# EAGLE board SparkFun_Thing_Plus_NINA-B306-Panel (EAGLE 9.6.2), part 1 of 6
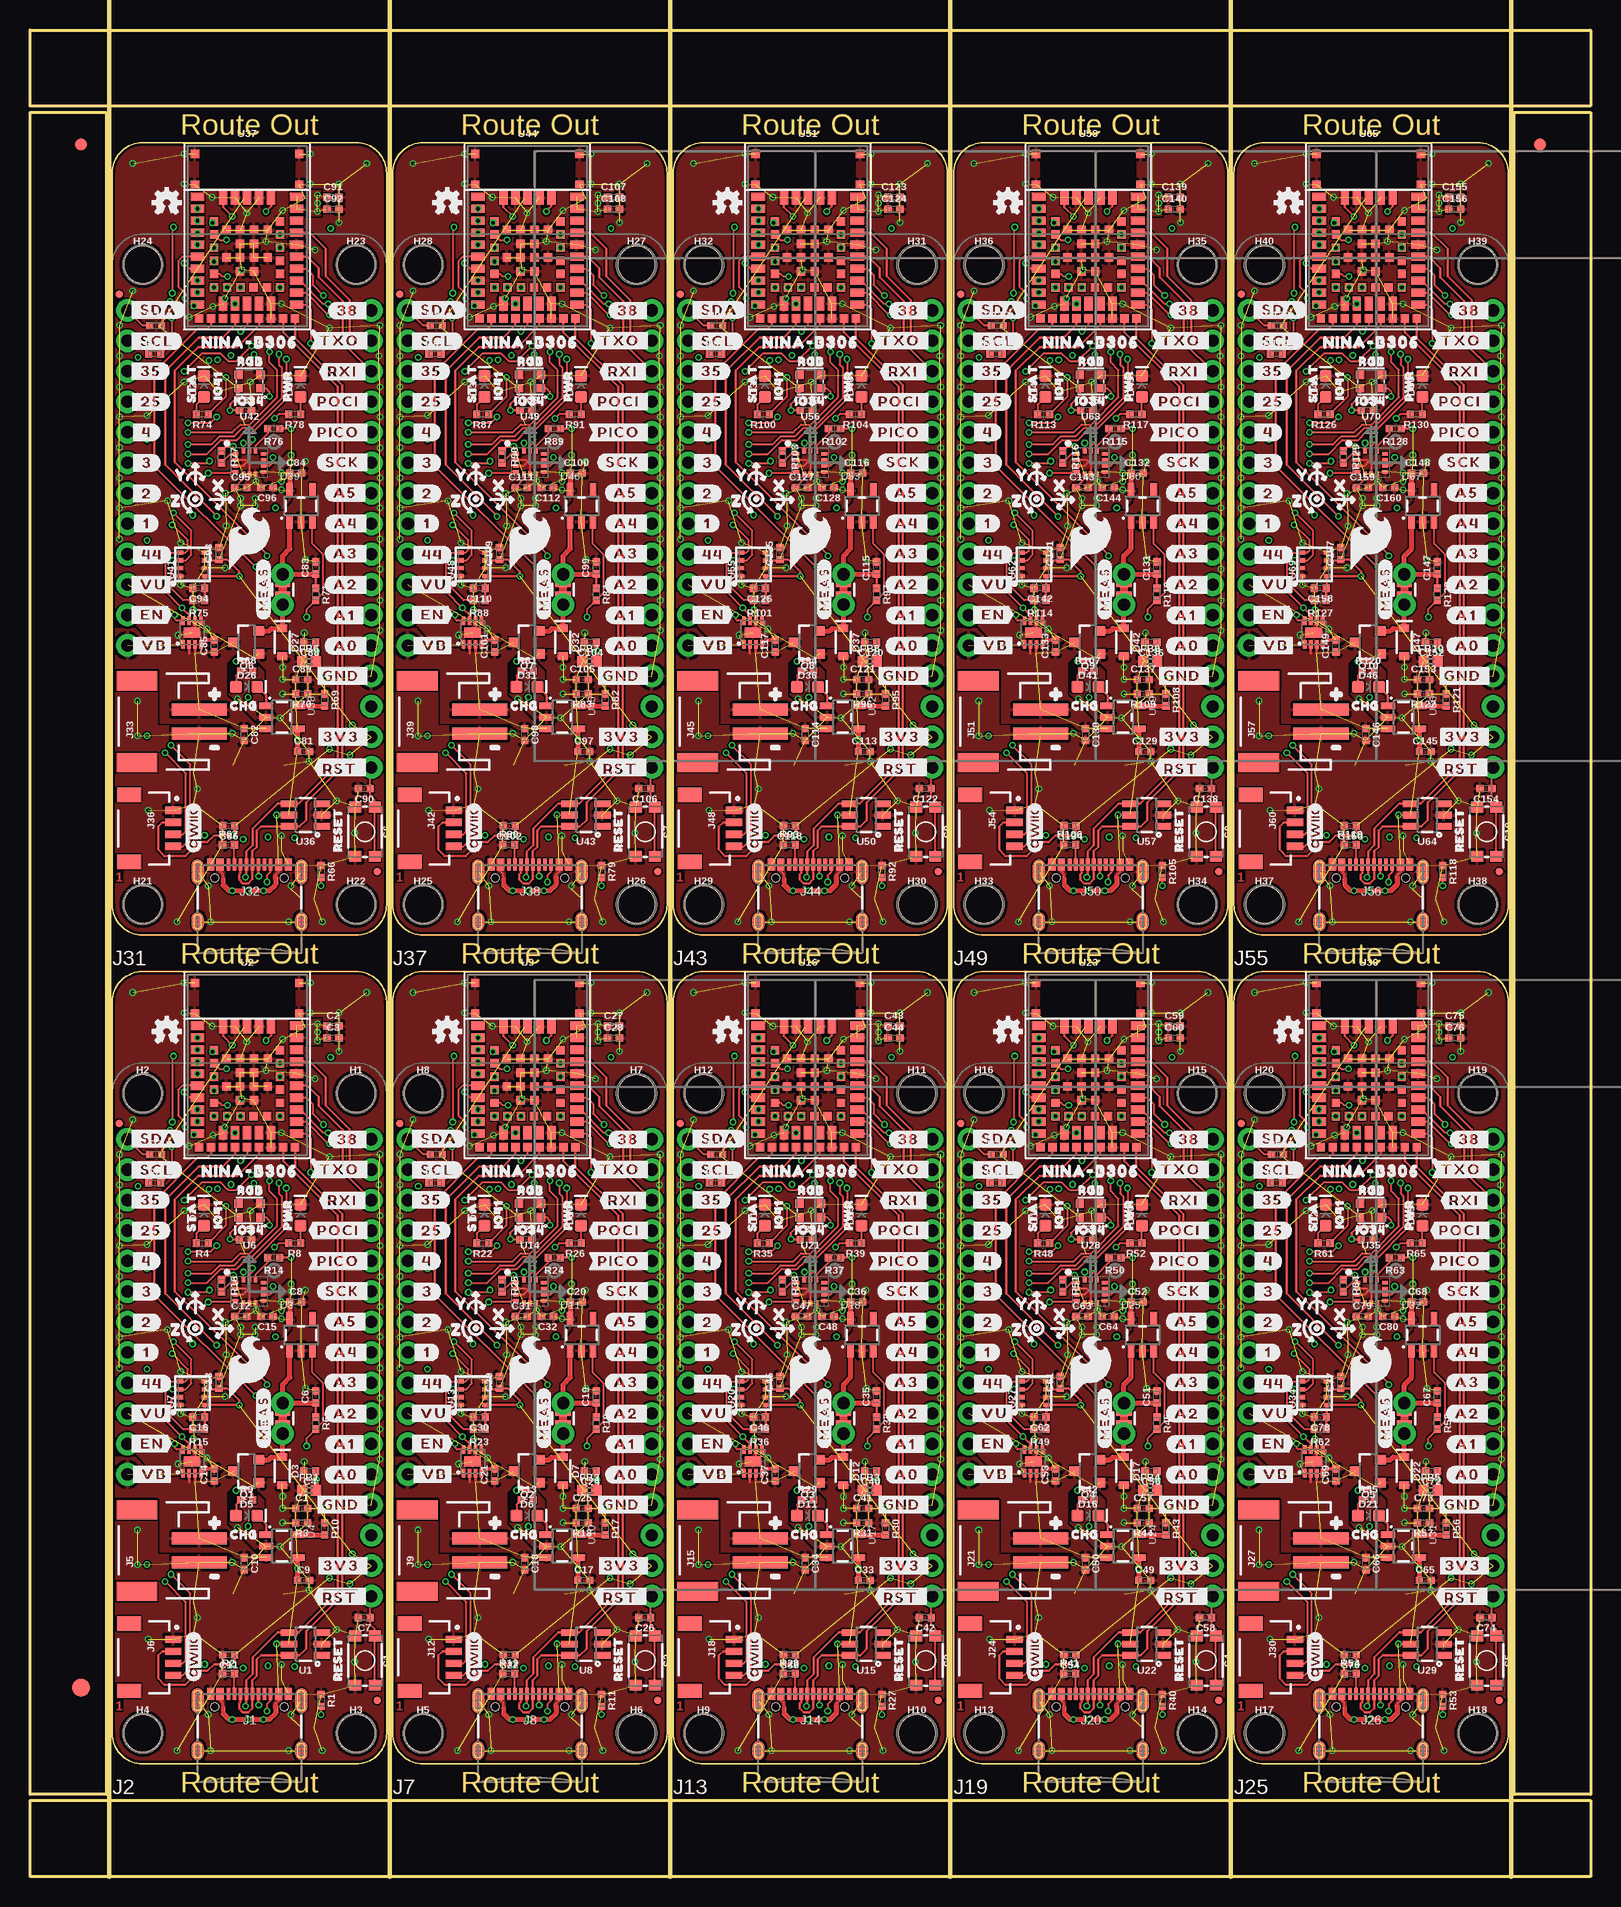
[diagram p0: board, top side]
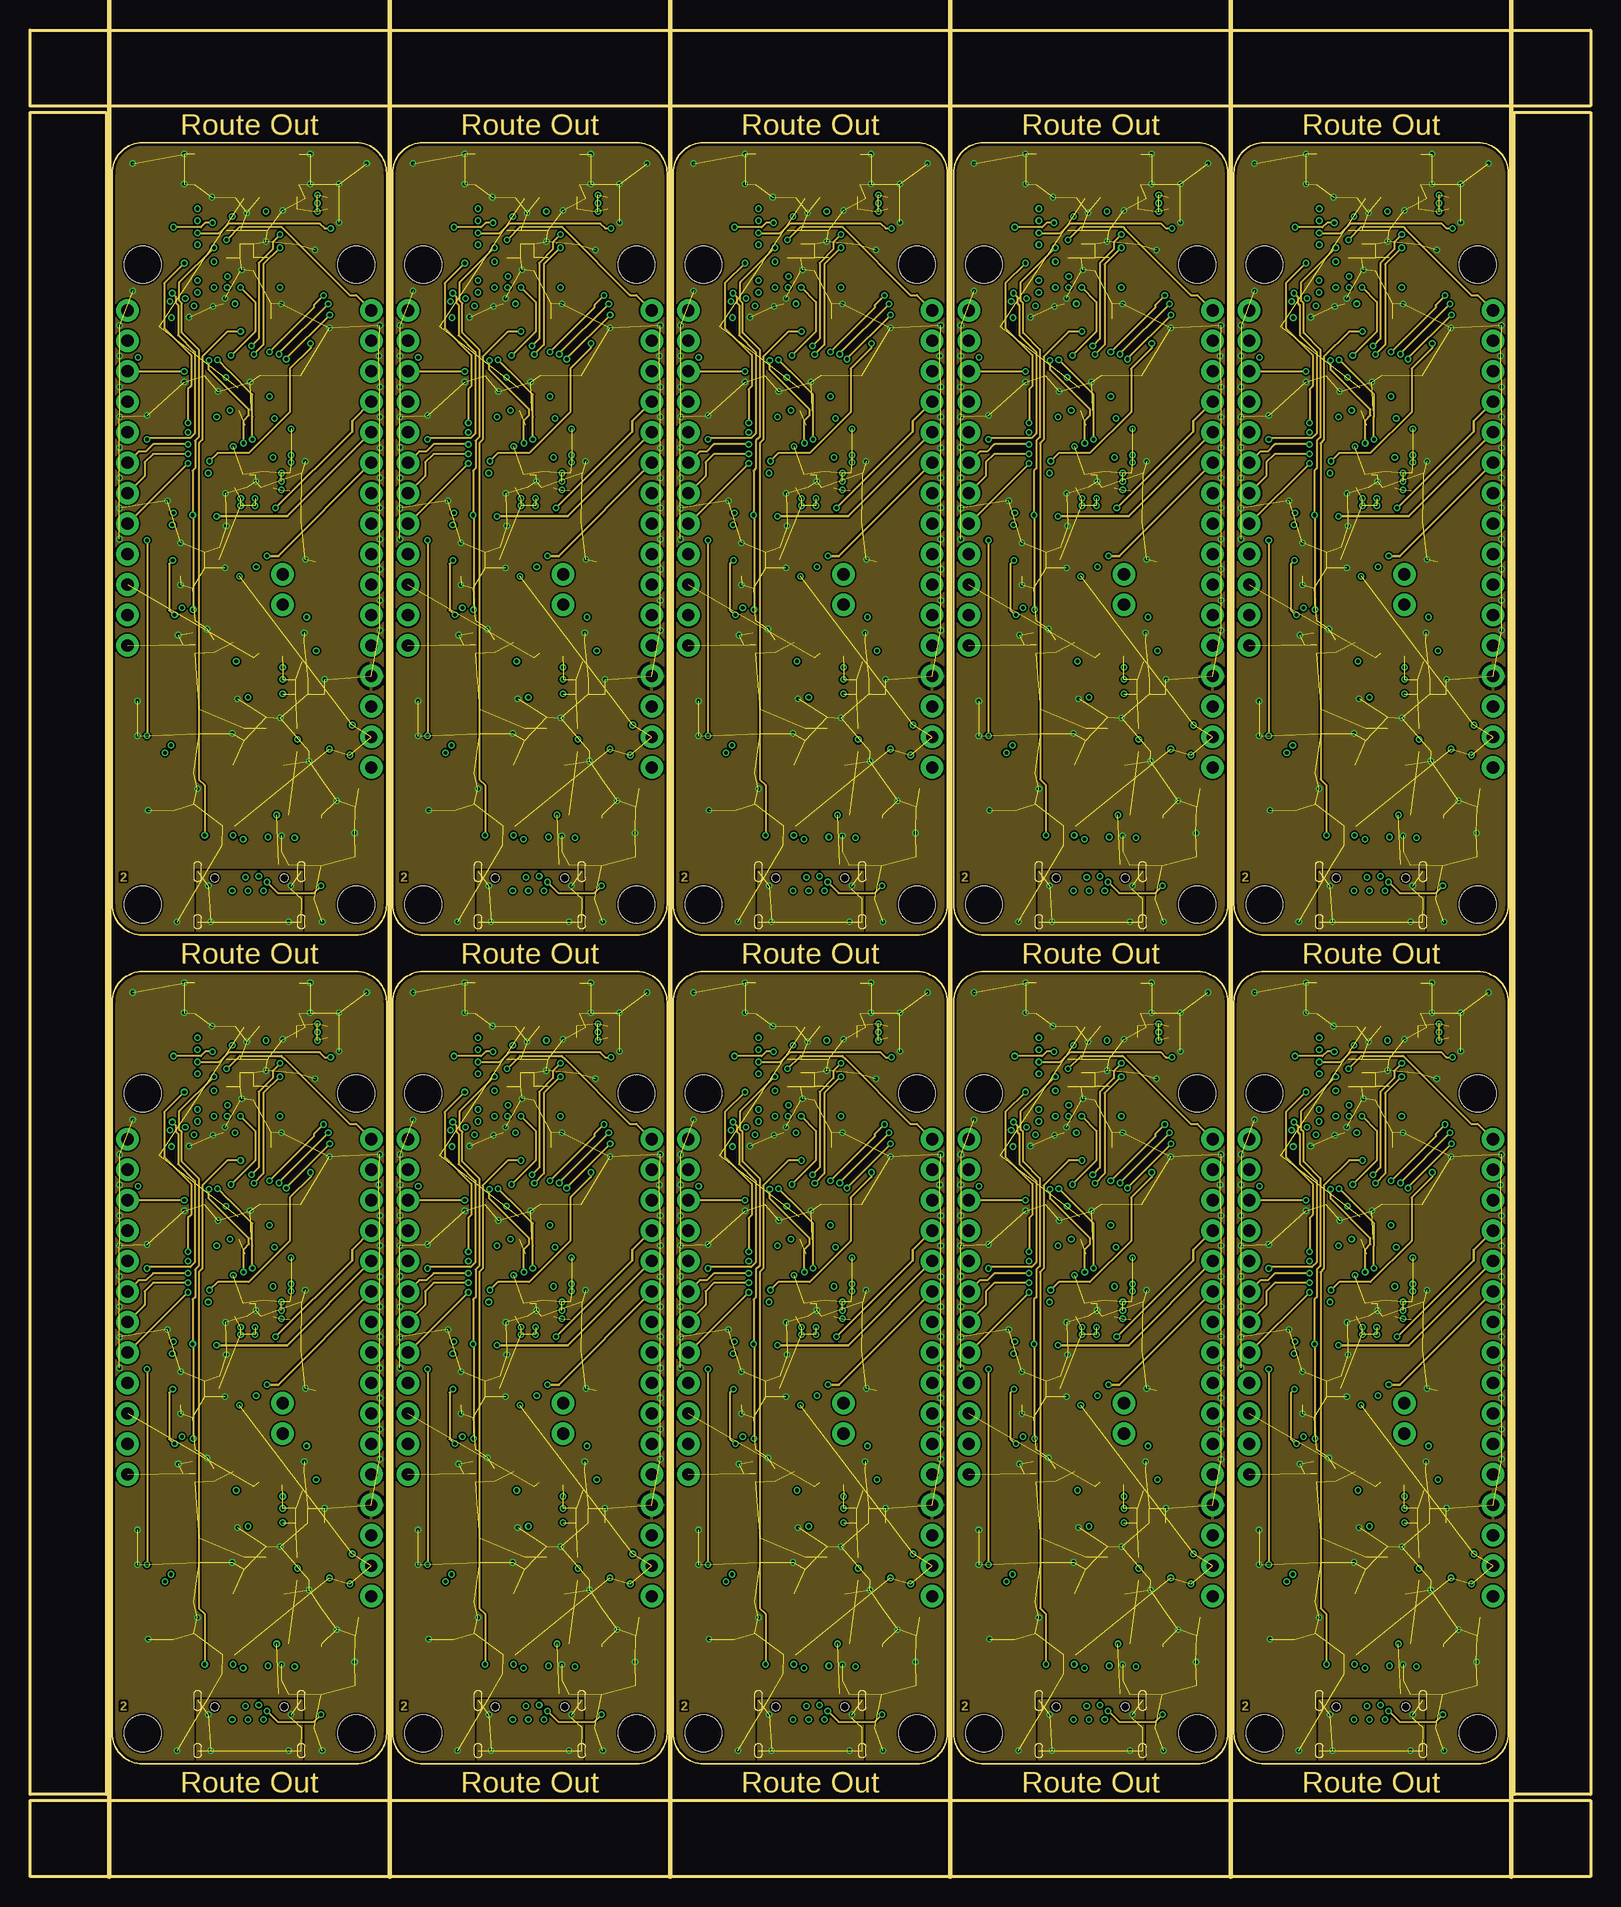
[diagram p1: board, inner layer Route2]
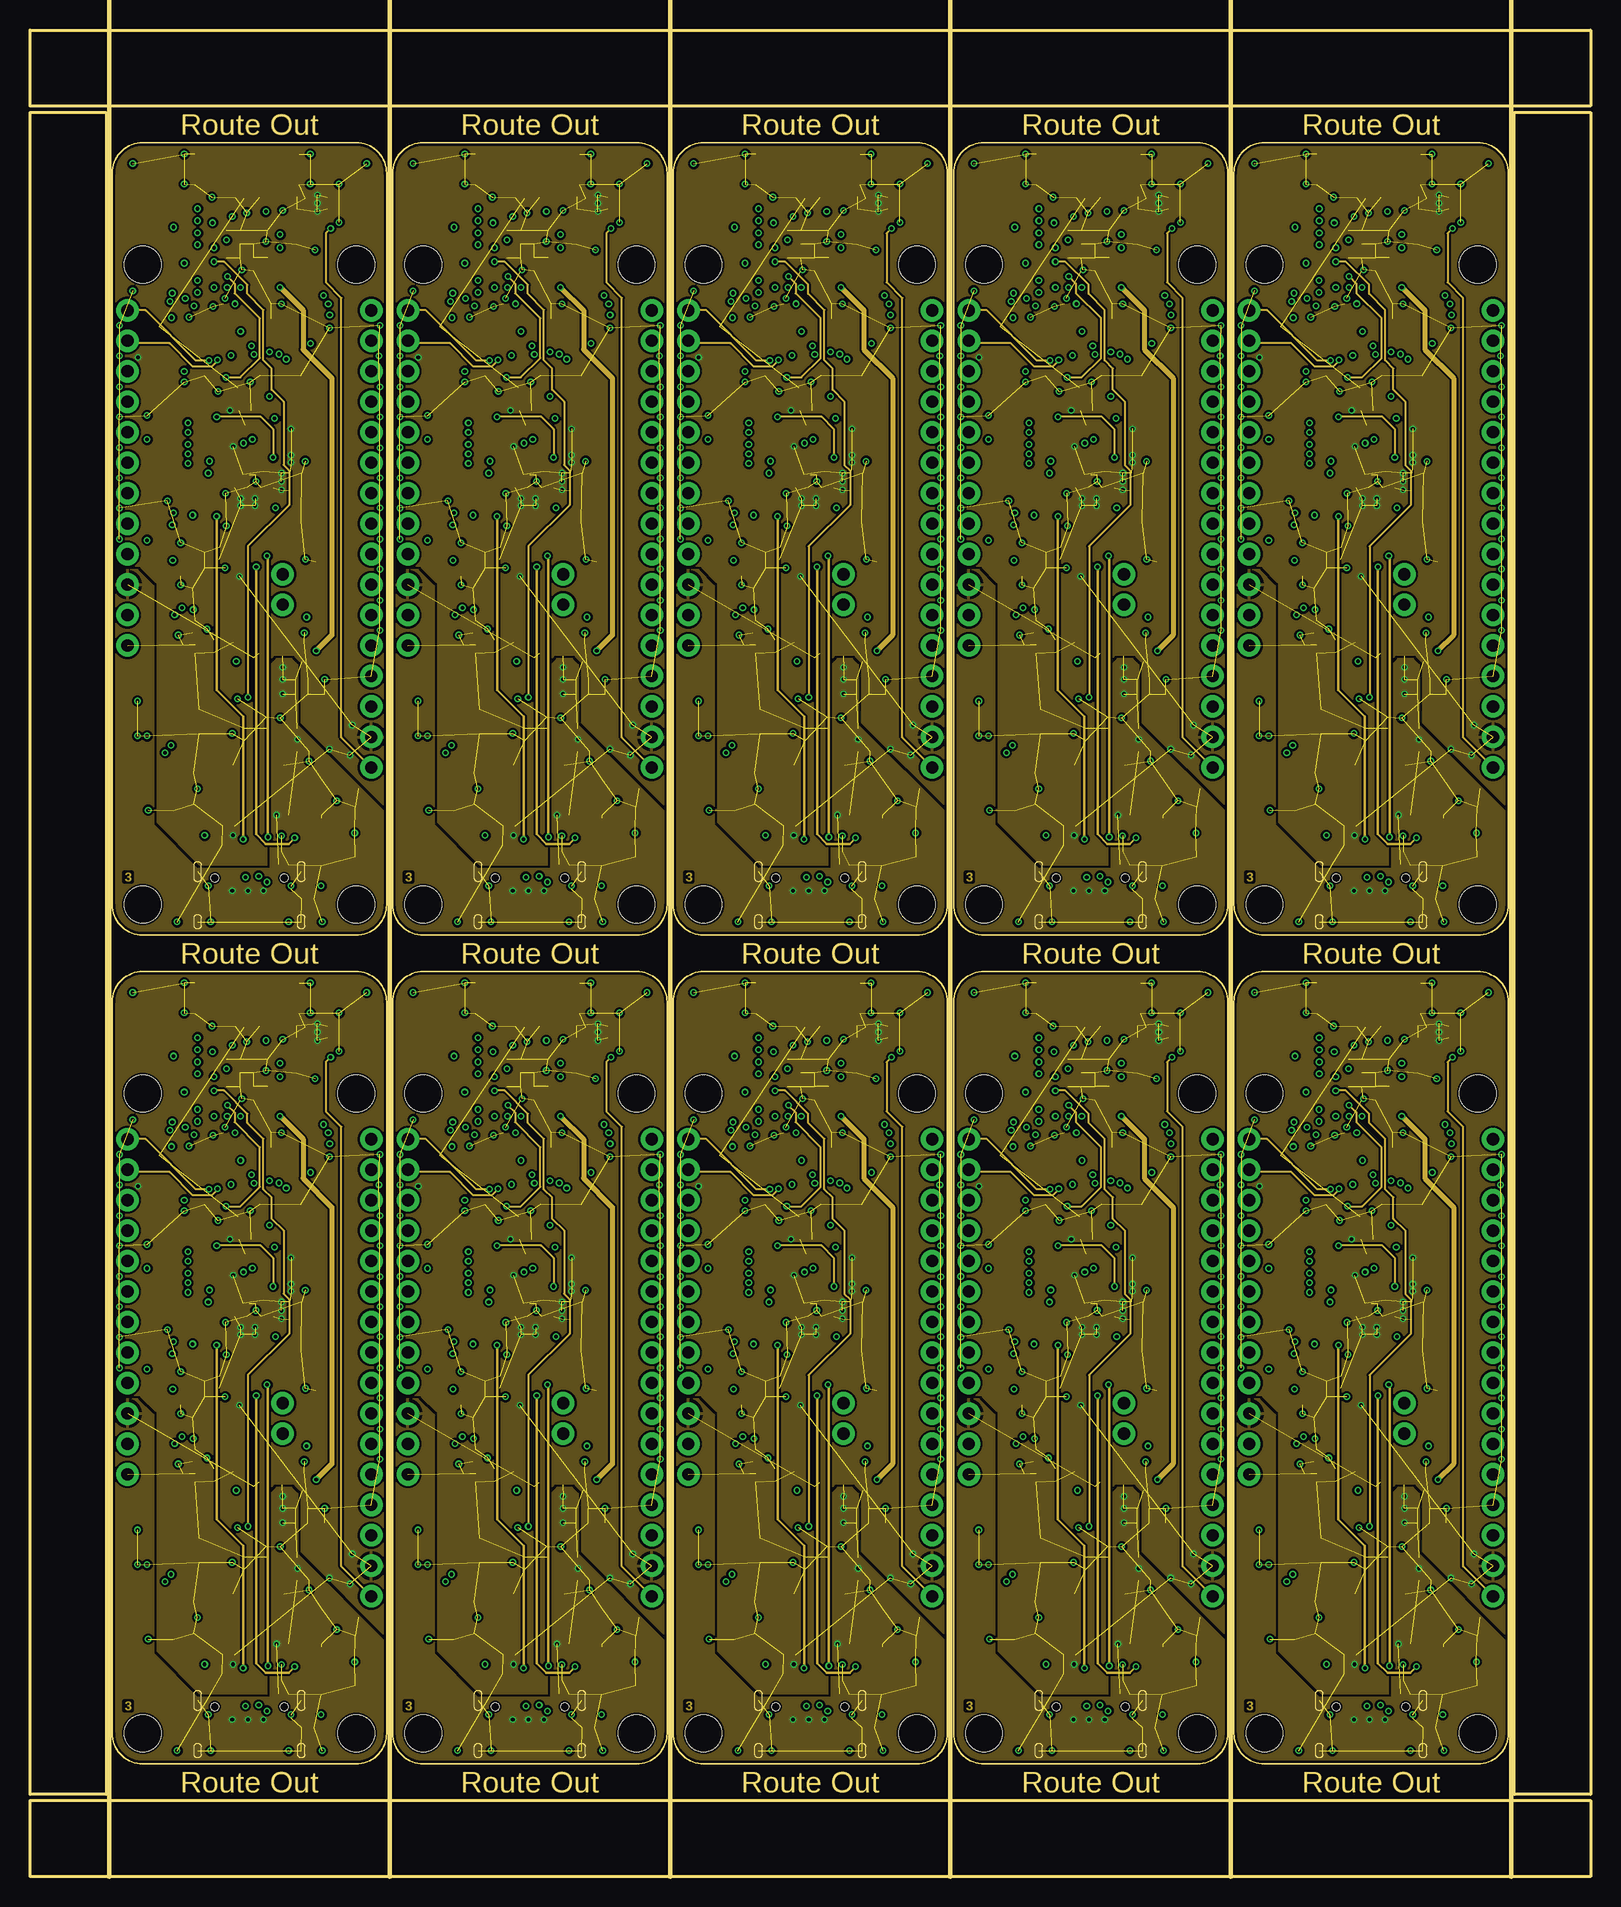
[diagram p2: board, inner layer Route15]
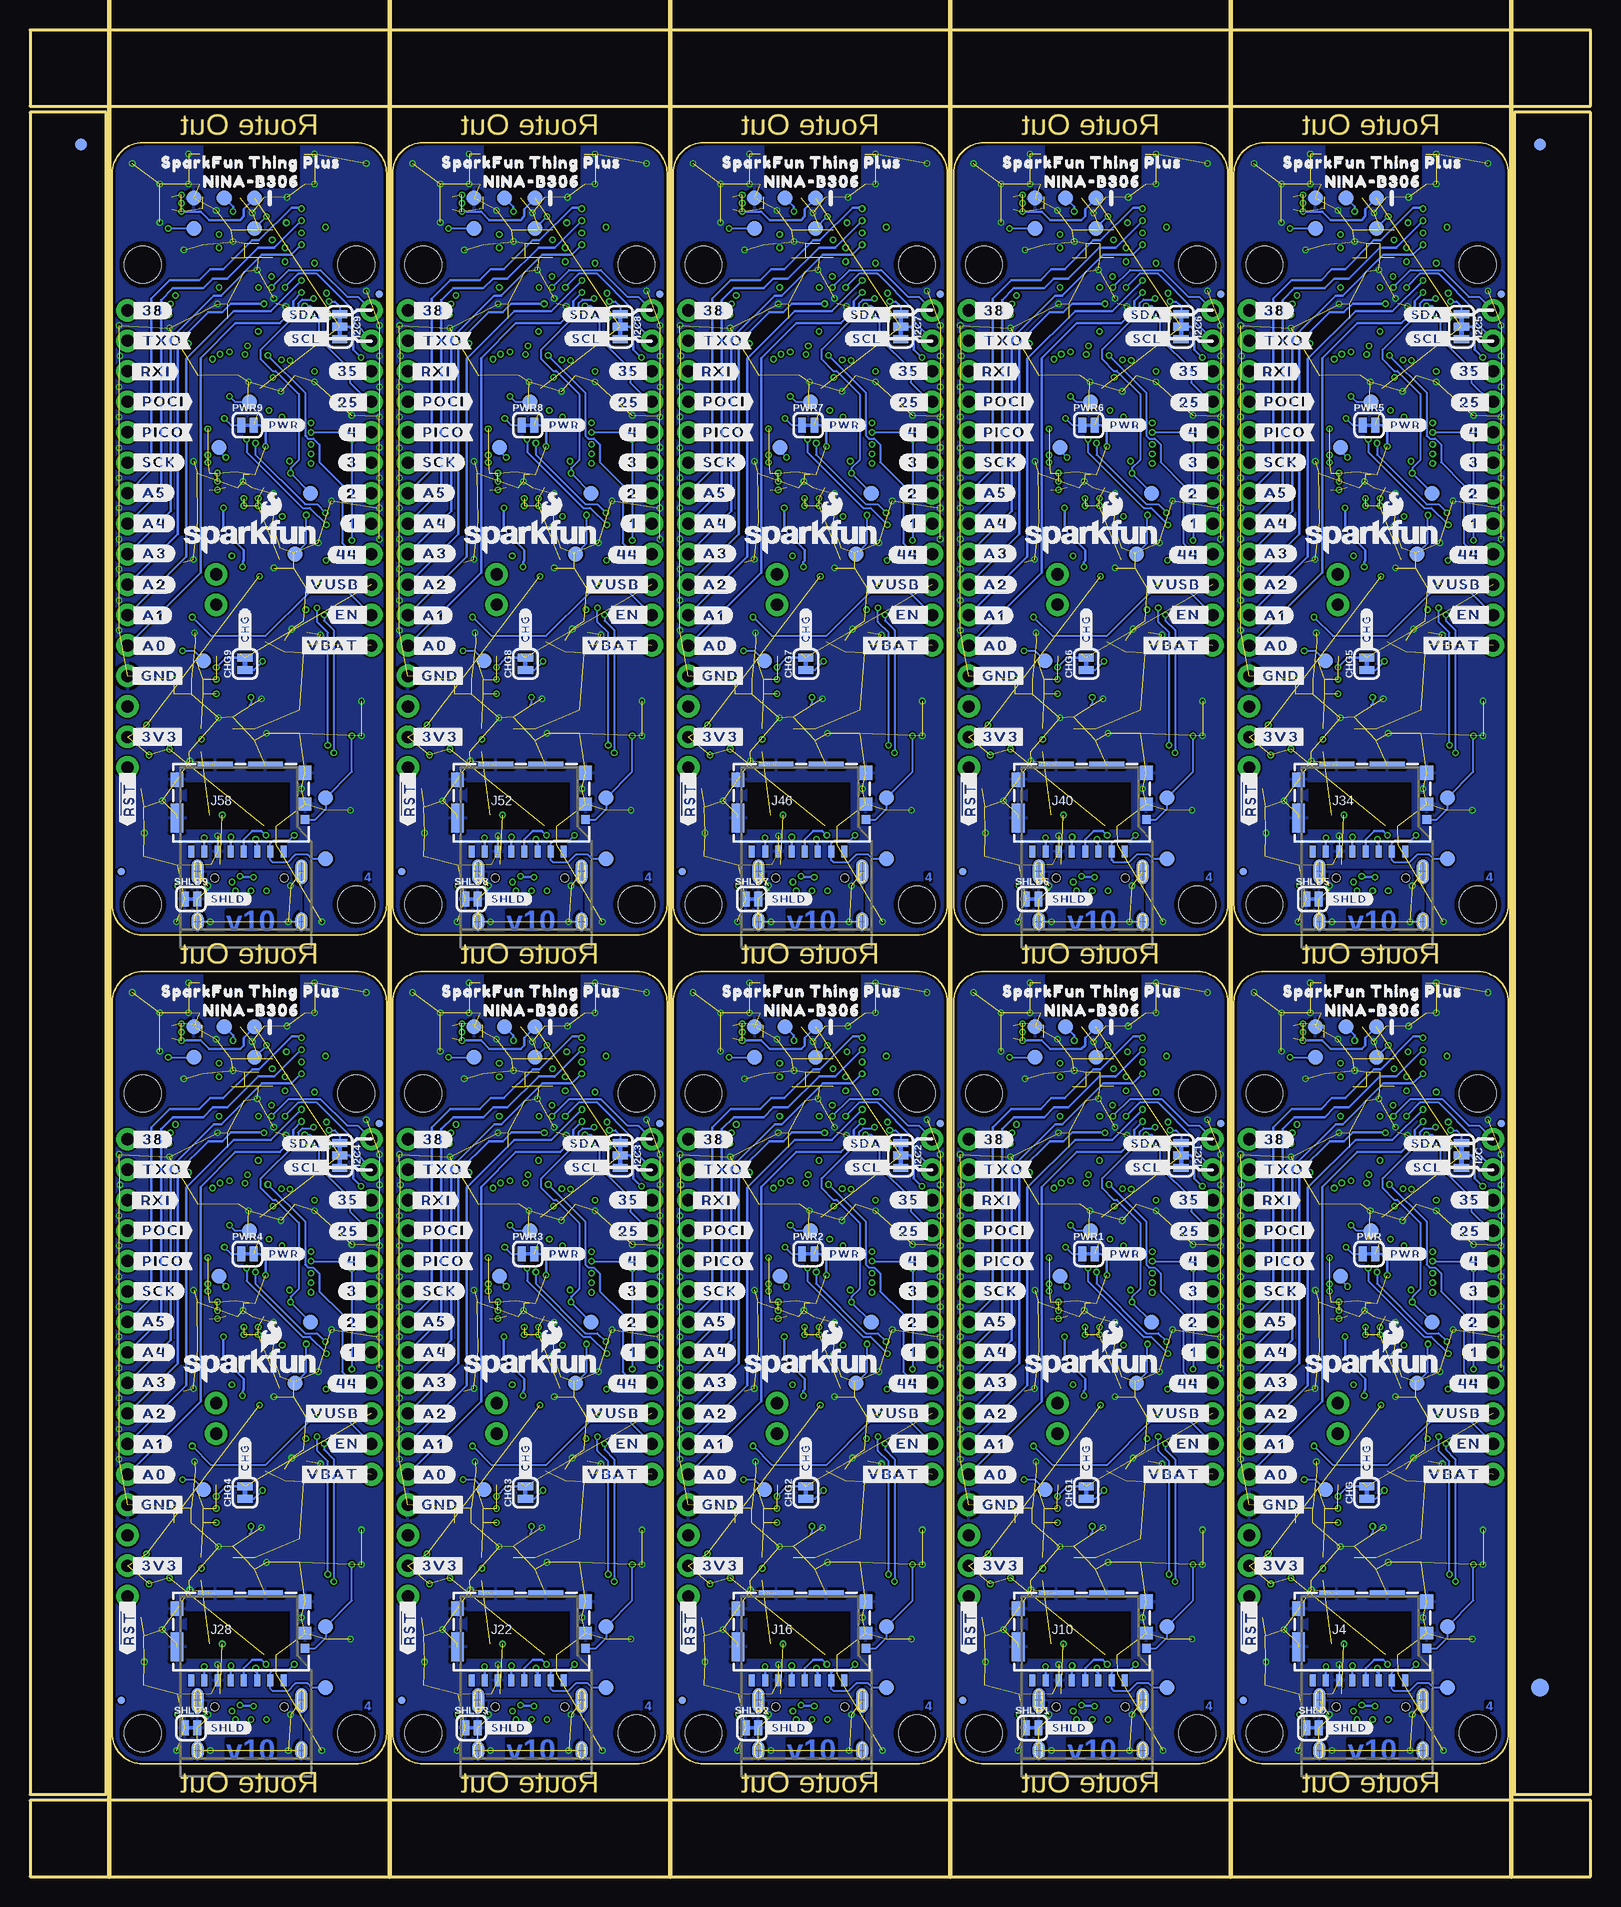
[diagram p3: board, bottom side, seen from below]

Size 130.05 x 153.92 mm. Coordinates in mm from the lower left corner, seen from the top.
Outline: 96 segments
Copper layers (1*2*15*16): Top 0.035mm / dielectric 0.2104mm / Route2 0.0152mm / dielectric 1.065mm / Route15 0.0152mm / dielectric 0.2104mm / Bottom 0.035mm
Design rules "SparkFun_Thing_Plus_NINA-B306": minimum track width 0.1mm, minimum drill 0.2mm, track to track 5mil, track to pad 5mil, pad to pad 5mil, via to via 5mil, smd to smd 0mil, copper to edge 7mil, drill to drill 7mil, minimum pad ring 5mil, minimum via ring 5mil, stop-mask expansion 2.5mil, vias tented up to drill 25mil, thermal gap 10mil
Net classes: 0 default: width 0.11 mm, drill 0.3 mm, clearance 0.11 mm; 1 power: width 0.2 mm, drill 0.3 mm, clearance 0.18 mm; 2 ground: width 0.11 mm, drill 0.3 mm, clearance 0.2 mm to class 0, clearance 0.11 mm to class 1; 3 analog: width 0.11 mm, drill 0.2 mm, clearance 0.2 mm to class 0, clearance 0.2 mm to class 1, clearance 0.2 mm to class 2, clearance 0.2 mm; 4 HS_digital: width 0.11 mm, drill 0.3 mm, clearance 0.2 mm to class 0, clearance 0.3 mm to class 1, clearance 0.2 mm to class 2, clearance 0.2 mm to class 3, clearance 0.15 mm; 5 usb_diff: width 0.2 mm, drill 0.2 mm, clearance 0.2 mm to class 0, clearance 0.2 mm to class 1, clearance 0.2 mm to class 2, clearance 0.2 mm to class 3, clearance 0.4 mm to class 4, clearance 0.15 mm
tRestrict: area 18.5,47.4 to 18.6,47.9; area 16.8,48.7 to 17.3,48.8; area 12.5,52.5 to 12.9,52.6; area 41.9,47.4 to 42,47.9; area 40.2,48.7 to 40.7,48.8; area 35.8,52.5 to 36.2,52.6; area 65.2,47.4 to 65.3,47.9; area 63.5,48.7 to 64,48.8; area 59.2,52.5 to 59.6,52.6; area 88.6,47.4 to 88.7,47.9; area 86.9,48.7 to 87.4,48.8; area 82.6,52.5 to 83,52.6; 18 more areas
bRestrict: area 23.8,42.7 to 24,42.8; area 24.5,44.7 to 24.7,44.8; area 25.2,46.4 to 25.4,46.5; area 25.1,59.1 to 25.3,59.2; area 26,48.1 to 26.2,48.2; area 47.1,42.7 to 47.3,42.8; area 47.8,44.7 to 48,44.8; area 48.5,46.4 to 48.7,46.5; area 48.4,59.1 to 48.6,59.2; area 49.3,48.1 to 49.5,48.2; area 70.5,42.7 to 70.7,42.8; area 71.2,44.7 to 71.4,44.8; 38 more areas
Milling: 6 lines

## Footprints (pad centres in the part's own frame; a part is rotated, then mirrored left to right if it is on the bottom)
0402-TIGHT = smd 0.6 x 0.6: 1 -0.5,0; 2 0.5,0
SMT-JUMPER_2_NC_TRACE_SILK = smd 0.66 x 1.27: 1 -0.521,0; 2 0.521,0
WS2812-2020 = smd 0.7 x 0.7: DI -0.915,0.55; DO 0.915,-0.55; GND 0.915,0.55; VCC -0.915,-0.55
LED-0603 = smd 1 x 1: A -0.877,0; C 0.877,0
SOD-323 = smd 0.63 x 0.83: A 1.15,0; C -1.15,0
FIDUCIAL-1X2 = smd 1 x 1: 1 0,0
FIDUCIAL-1.5X3 = smd 1.5 x 1.5: 1 0,0
0402 = smd 0.85 x 0.9: 1 -0.58,0; 2 0.58,0
FIDUCIAL-MICRO = smd 0.635 x 0.635: 1 0,0
STAND-OFF-TIGHT = hole 3.048: 0,0
SMT-JUMPER_3_2-NC_TRACE_SILK = smd 0.66 x 1.27: 1 -1.041,0; 2 0,0; 3 1.041,0
USB-C-16P-4LAYER-ISOLATED = smd 0.3 x 1: A5 -1.25,-0.34; A6 -0.25,-0.34; A7 0.25,-0.34; A8 1.25,-0.34; B5 1.75,-0.34; B6 0.75,-0.34; B7 -0.75,-0.34; B8 -1.75,-0.34 | smd 0.6 x 1: GND -3.225,-0.34; GND2 3.225,-0.34; VBUS1 -2.45,-0.34; VBUS2 2.45,-0.34 | smd 1 x 2.1: SHLD1 -4.32,-0.915; SHLD2 4.32,-0.915 | smd 1 x 2.1 bottom: SHLD3 -4.32,-0.915; SHLD4 4.32,-0.915 | smd 1 x 1.6: SHLD5 -4.32,-5.095; SHLD8 4.32,-5.095 | smd 1 x 1.6 bottom: SHLD6 -4.32,-5.095; SHLD7 4.32,-5.095 | hole 0.65: -2.89,-1.445; 2.89,-1.445
THING_PLUS = drill 1.016 pad 1.88: 1 1.27,52.07; 2 1.27,49.53; 3 1.27,46.99; 4 1.27,44.45; 5 1.27,41.91; 6 1.27,39.37; 7 1.27,36.83; 8 1.27,34.29; 9 1.27,31.75; 10 1.27,29.21; 11 1.27,26.67; 12 1.27,24.13; 13 21.59,52.07; 14 21.59,49.53; 15 21.59,46.99; 16 21.59,44.45; 17 21.59,41.91; 18 21.59,39.37; 19 21.59,36.83; 20 21.59,34.29; 21 21.59,31.75; 22 21.59,29.21; 23 21.59,26.67; 24 21.59,24.13; 25 21.59,21.59; 26 21.59,19.05; 27 21.59,16.51; 28 21.59,13.97
PAD_05_03X2_TP_NO4 = smd 1.27 x 1.27: 1 -2.54,-1.27; 2 -2.54,1.27; 3 0,-1.27; 5 2.54,-1.27; 6 2.54,1.27
MICROSD_TINY = smd 0.5 x 1: 1 3.55,-3.85; 2 2.45,-3.85; 3 1.35,-3.85; 4 0.25,-3.85; 5 -0.85,-3.85; 6 -1.95,-3.85; 7 -3.05,-3.85; 8 -4.15,-3.85 | smd 0.72 x 0.78: 9 5.35,-1.17 | smd 1.05 x 1.08: GND1 5.35,0.1 | smd 1.05 x 1.2: GND2 5.35,2.71; GND3 -5.325,2.14 | smd 1.05 x 2.39: GND4 -5.325,-1.045 | smd 2.91 x 0.55: GND5 -2.145,3.385; GND6 2.045,3.385
JST-2-SMD = smd 1 x 4.6: 1 -1,-3.7; 2 1,-3.7 | smd 1.6 x 3.4: NC1 -3.4,1.5; NC2 3.4,1.5
JST04_1MM_RA = smd 0.6 x 1.35: 1 -1.5,0; 2 -0.5,0; 3 0.5,0; 4 1.5,0 | smd 1.2 x 2: NC1 2.8,-3.675; NC2 -2.8,-3.675
COMBO-JUMPER_2_NC_TRACE = smd 0.635 x 1.27: 1 -0.508,0; 2 0.508,0 | drill 1.016 pad 1.88: 3 -1.27,0; 4 1.27,0
SOT23-3 = smd 0.8 x 0.9: 1 -0.95,-1; 2 0.95,-1; 3 0,1.1
TACTILE_SWITCH_SMD_4.6X2.8MM = smd 0.9 x 1: 1 -2.05,-0.8; 2 2.05,-0.8; 3 2.05,0.8; 4 -2.05,0.8
PAD.03X.05 = smd 1.27 x 1.27: 1 0,0
SOT-23-6 = smd 0.55 x 1.35: 1 -0.95,-1.375; 2 0,-1.375; 3 0.95,-1.375; 4 0.95,1.375; 5 0,1.375; 6 -0.95,1.375
NINA_B306 = smd 1.15 x 0.7: 1 4.125,-5.7; 2 4.125,-4.7; 3 4.125,-3.7; 4 4.125,-2.7; 5 4.125,-1.7; 6 4.125,-0.7; 7 4.125,0.3; 8 4.125,1.3; 9 4.125,2.3; 10 4.125,3.3; 16 -4.125,3.3; 17 -4.125,2.3; 18 -4.125,1.3; 19 -4.125,0.3; 20 -4.125,-0.7; 21 -4.125,-1.7; 22 -4.125,-2.7; 23 -4.125,-3.7; 24 -4.125,-4.7; 25 -4.125,-5.7 | smd 0.7 x 1.15: 11 2,3.225; 12 1,3.225; 13 0,3.225; 14 -1,3.225; 15 -2,3.225; 26 -2,-5.625; 27 -1,-5.625; 28 0,-5.625; 29 1,-5.625; 30 2,-5.625 | smd 0.7 x 0.7: 31 2.75,-4.25; 32 2.75,-3.15; 33 2.75,-2.05; 34 2.75,-0.95; 35 2.75,0.15; 36 2.75,1.25; 37 -2.75,1.25; 38 -2.75,0.15; 39 -2.75,-0.95; 40 -2.75,-2.05; 41 -2.75,-3.15; 42 -2.75,-4.25; 43 -1.65,-4.25; 44 -0.55,-4.25; 45 0.55,-4.25; 46 1.65,-4.25; 47 -4,-6.85; 48 -3,-6.85; 49 -2,-6.85; 50 -1,-6.85; 51 0,-6.85; 52 1,-6.85; 53 2,-6.85; 54 3,-6.85; 55 4,-6.85; 56 1.725,0.525; 57 0.575,0.525; 58 -0.575,0.525; 59 -1.725,0.525; 60 0.575,-0.625; 61 -0.575,-0.625; 62 1.725,-1.775; 63 0.575,-1.775; 64 -0.575,-1.775; 65 -1.725,-1.775; 66 0.575,-2.925; 67 -0.575,-2.925; 68 4.35,4.3; 69 4.35,6.85; 70 -4.35,6.85; 71 -4.35,4.3
SOT23-5 = smd 0.55 x 1.2: 1 -0.95,-1.3; 2 0,-1.3; 3 0.95,-1.3; 4 0.95,1.3; 5 -0.95,1.3
DFN-8 = smd 0.3 x 0.7: 1 -0.75,-0.99; 2 -0.25,-0.99; 3 0.25,-0.99; 4 0.75,-0.99; 5 0.75,0.99; 6 0.25,0.99; 7 -0.25,0.99; 8 -0.75,0.99 | smd 1.38 x 0.8: 9 0,0
LGA-14L = smd 0.48 x 0.3: P1 -1.163,0.75; P2 -1.163,0.25; P3 -1.163,-0.25; P4 -1.163,-0.75; P8 1.163,-0.75; P9 1.163,-0.25; P10 1.163,0.25; P11 1.163,0.75 | smd 0.3 x 0.48: P5 -0.5,-1; P6 0,-1; P7 0.5,-1; P12 0.5,1; P13 0,1; P14 -0.5,1
LGA-8-2.5X2.5 = smd 0.35 x 0.5: 1 -0.975,1.025; 2 -0.325,1.025; 3 0.325,1.025; 4 0.975,1.025; 5 0.975,-1.025; 6 0.325,-1.025; 7 -0.325,-1.025; 8 -0.975,-1.025

## Placement (x,y rotation side)
C1  1.0nF  [0402-TIGHT]  22.66,30.7 0 top
C2  0.1uF  [0402-TIGHT]  25.26,70.9 0 top
C3  0.1uF  [0402-TIGHT]  25.26,69.9 0 top
C4  1.0nF  [0402-TIGHT]  23.32,33.8 180 top
C5  0.1uF  [0402-TIGHT]  17.96,53.1 0 top
C6  1.0uF  [0402-TIGHT]  23.81,40 90 top
C7  0.1uF  [0402-TIGHT]  27.86,21.6 180 top
C8  2.2uF  [0402-TIGHT]  22.16,47.9 0 top
C9  4.7uF  [0402-TIGHT]  22.79,24.7 0 top
C10  4.7uF  [0402-TIGHT]  17.86,26.1 270 top
C11  10uF  [0402-TIGHT]  16.56,18.5 180 top
C12  0.1uF  [0402-TIGHT]  17.56,46.7 0 top
C13  0.1uF  [0402-TIGHT]  15.76,41.2 90 top
C14  0.1uF  [0402-TIGHT]  15.36,33.5 90 top
C15  0.1uF  [0402-TIGHT]  19.76,46.7 180 top
C16  0.1uF  [0402-TIGHT]  14.06,38.3 180 top
C17  4.7uF  [0402-TIGHT]  46.16,24.7 0 top
C18  4.7uF  [0402-TIGHT]  41.23,26.1 270 top
C19  1.0uF  [0402-TIGHT]  47.18,40 90 top
C20  2.2uF  [0402-TIGHT]  45.53,47.9 0 top
C21  0.1uF  [0402-TIGHT]  38.73,33.5 90 top
C22  10uF  [0402-TIGHT]  39.93,18.5 180 top
C23  0.1uF  [0402-TIGHT]  41.33,53.1 0 top
C24  1.0nF  [0402-TIGHT]  46.69,33.8 180 top
C25  1.0nF  [0402-TIGHT]  46.03,30.7 0 top
C26  0.1uF  [0402-TIGHT]  51.23,21.6 180 top
C27  0.1uF  [0402-TIGHT]  48.63,70.9 0 top
C28  0.1uF  [0402-TIGHT]  48.63,69.9 0 top
C29  0.1uF  [0402-TIGHT]  39.13,41.2 90 top
C30  0.1uF  [0402-TIGHT]  37.43,38.3 180 top
C31  0.1uF  [0402-TIGHT]  40.93,46.7 0 top
C32  0.1uF  [0402-TIGHT]  43.13,46.7 180 top
C33  4.7uF  [0402-TIGHT]  69.52,24.7 0 top
C34  4.7uF  [0402-TIGHT]  64.59,26.1 270 top
C35  1.0uF  [0402-TIGHT]  70.54,40 90 top
C36  2.2uF  [0402-TIGHT]  68.89,47.9 0 top
C37  0.1uF  [0402-TIGHT]  62.09,33.5 90 top
C38  10uF  [0402-TIGHT]  63.29,18.5 180 top
C39  0.1uF  [0402-TIGHT]  64.69,53.1 0 top
C40  1.0nF  [0402-TIGHT]  70.05,33.8 180 top
C41  1.0nF  [0402-TIGHT]  69.39,30.7 0 top
C42  0.1uF  [0402-TIGHT]  74.59,21.6 180 top
C43  0.1uF  [0402-TIGHT]  71.99,70.9 0 top
C44  0.1uF  [0402-TIGHT]  71.99,69.9 0 top
C45  0.1uF  [0402-TIGHT]  62.49,41.2 90 top
C46  0.1uF  [0402-TIGHT]  60.79,38.3 180 top
C47  0.1uF  [0402-TIGHT]  64.29,46.7 0 top
C48  0.1uF  [0402-TIGHT]  66.49,46.7 180 top
C49  4.7uF  [0402-TIGHT]  92.89,24.7 0 top
C50  4.7uF  [0402-TIGHT]  87.96,26.1 270 top
C51  1.0uF  [0402-TIGHT]  93.91,40 90 top
C52  2.2uF  [0402-TIGHT]  92.26,47.9 0 top
C53  0.1uF  [0402-TIGHT]  85.46,33.5 90 top
C54  10uF  [0402-TIGHT]  86.66,18.5 180 top
C55  0.1uF  [0402-TIGHT]  88.06,53.1 0 top
C56  1.0nF  [0402-TIGHT]  93.42,33.8 180 top
C57  1.0nF  [0402-TIGHT]  92.76,30.7 0 top
C58  0.1uF  [0402-TIGHT]  97.96,21.6 180 top
C59  0.1uF  [0402-TIGHT]  95.36,70.9 0 top
C60  0.1uF  [0402-TIGHT]  95.36,69.9 0 top
C61  0.1uF  [0402-TIGHT]  85.86,41.2 90 top
C62  0.1uF  [0402-TIGHT]  84.16,38.3 180 top
C63  0.1uF  [0402-TIGHT]  87.66,46.7 0 top
C64  0.1uF  [0402-TIGHT]  89.86,46.7 180 top
C65  4.7uF  [0402-TIGHT]  116.26,24.7 0 top
C66  4.7uF  [0402-TIGHT]  111.33,26.1 270 top
C67  1.0uF  [0402-TIGHT]  117.28,40 90 top
C68  2.2uF  [0402-TIGHT]  115.63,47.9 0 top
C69  0.1uF  [0402-TIGHT]  108.83,33.5 90 top
C70  10uF  [0402-TIGHT]  110.03,18.5 180 top
C71  0.1uF  [0402-TIGHT]  111.43,53.1 0 top
C72  1.0nF  [0402-TIGHT]  116.79,33.8 180 top
C73  1.0nF  [0402-TIGHT]  116.13,30.7 0 top
C74  0.1uF  [0402-TIGHT]  121.33,21.6 180 top
C75  0.1uF  [0402-TIGHT]  118.73,70.9 0 top
C76  0.1uF  [0402-TIGHT]  118.73,69.9 0 top
C77  0.1uF  [0402-TIGHT]  109.23,41.2 90 top
C78  0.1uF  [0402-TIGHT]  107.53,38.3 180 top
C79  0.1uF  [0402-TIGHT]  111.03,46.7 0 top
C80  0.1uF  [0402-TIGHT]  113.23,46.7 180 top
C81  4.7uF  [0402-TIGHT]  22.79,93.79 0 top
C82  4.7uF  [0402-TIGHT]  17.86,95.19 270 top
C83  1.0uF  [0402-TIGHT]  23.81,109.09 90 top
C84  2.2uF  [0402-TIGHT]  22.16,116.99 0 top
C85  0.1uF  [0402-TIGHT]  15.36,102.59 90 top
C86  10uF  [0402-TIGHT]  16.56,87.59 180 top
C87  0.1uF  [0402-TIGHT]  17.96,122.19 0 top
C88  1.0nF  [0402-TIGHT]  23.32,102.89 180 top
C89  1.0nF  [0402-TIGHT]  22.66,99.79 0 top
C90  0.1uF  [0402-TIGHT]  27.86,90.69 180 top
C91  0.1uF  [0402-TIGHT]  25.26,139.99 0 top
C92  0.1uF  [0402-TIGHT]  25.26,138.99 0 top
C93  0.1uF  [0402-TIGHT]  15.76,110.29 90 top
C94  0.1uF  [0402-TIGHT]  14.06,107.39 180 top
C95  0.1uF  [0402-TIGHT]  17.56,115.79 0 top
C96  0.1uF  [0402-TIGHT]  19.76,115.79 180 top
C97  4.7uF  [0402-TIGHT]  46.16,93.79 0 top
C98  4.7uF  [0402-TIGHT]  41.23,95.19 270 top
C99  1.0uF  [0402-TIGHT]  47.18,109.09 90 top
C100  2.2uF  [0402-TIGHT]  45.53,116.99 0 top
C101  0.1uF  [0402-TIGHT]  38.73,102.59 90 top
C102  10uF  [0402-TIGHT]  39.93,87.59 180 top
C103  0.1uF  [0402-TIGHT]  41.33,122.19 0 top
C104  1.0nF  [0402-TIGHT]  46.69,102.89 180 top
C105  1.0nF  [0402-TIGHT]  46.03,99.79 0 top
C106  0.1uF  [0402-TIGHT]  51.23,90.69 180 top
C107  0.1uF  [0402-TIGHT]  48.63,139.99 0 top
C108  0.1uF  [0402-TIGHT]  48.63,138.99 0 top
C109  0.1uF  [0402-TIGHT]  39.13,110.29 90 top
C110  0.1uF  [0402-TIGHT]  37.43,107.39 180 top
C111  0.1uF  [0402-TIGHT]  40.93,115.79 0 top
C112  0.1uF  [0402-TIGHT]  43.13,115.79 180 top
C113  4.7uF  [0402-TIGHT]  69.52,93.79 0 top
C114  4.7uF  [0402-TIGHT]  64.59,95.19 270 top
C115  1.0uF  [0402-TIGHT]  70.54,109.09 90 top
C116  2.2uF  [0402-TIGHT]  68.89,116.99 0 top
C117  0.1uF  [0402-TIGHT]  62.09,102.59 90 top
C118  10uF  [0402-TIGHT]  63.29,87.59 180 top
C119  0.1uF  [0402-TIGHT]  64.69,122.19 0 top
C120  1.0nF  [0402-TIGHT]  70.05,102.89 180 top
C121  1.0nF  [0402-TIGHT]  69.39,99.79 0 top
C122  0.1uF  [0402-TIGHT]  74.59,90.69 180 top
C123  0.1uF  [0402-TIGHT]  71.99,139.99 0 top
C124  0.1uF  [0402-TIGHT]  71.99,138.99 0 top
C125  0.1uF  [0402-TIGHT]  62.49,110.29 90 top
C126  0.1uF  [0402-TIGHT]  60.79,107.39 180 top
C127  0.1uF  [0402-TIGHT]  64.29,115.79 0 top
C128  0.1uF  [0402-TIGHT]  66.49,115.79 180 top
C129  4.7uF  [0402-TIGHT]  92.89,93.79 0 top
C130  4.7uF  [0402-TIGHT]  87.96,95.19 270 top
C131  1.0uF  [0402-TIGHT]  93.91,109.09 90 top
C132  2.2uF  [0402-TIGHT]  92.26,116.99 0 top
C133  0.1uF  [0402-TIGHT]  85.46,102.59 90 top
C134  10uF  [0402-TIGHT]  86.66,87.59 180 top
C135  0.1uF  [0402-TIGHT]  88.06,122.19 0 top
C136  1.0nF  [0402-TIGHT]  93.42,102.89 180 top
C137  1.0nF  [0402-TIGHT]  92.76,99.79 0 top
C138  0.1uF  [0402-TIGHT]  97.96,90.69 180 top
C139  0.1uF  [0402-TIGHT]  95.36,139.99 0 top
C140  0.1uF  [0402-TIGHT]  95.36,138.99 0 top
C141  0.1uF  [0402-TIGHT]  85.86,110.29 90 top
C142  0.1uF  [0402-TIGHT]  84.16,107.39 180 top
C143  0.1uF  [0402-TIGHT]  87.66,115.79 0 top
C144  0.1uF  [0402-TIGHT]  89.86,115.79 180 top
C145  4.7uF  [0402-TIGHT]  116.26,93.79 0 top
C146  4.7uF  [0402-TIGHT]  111.33,95.19 270 top
C147  1.0uF  [0402-TIGHT]  117.28,109.09 90 top
C148  2.2uF  [0402-TIGHT]  115.63,116.99 0 top
C149  0.1uF  [0402-TIGHT]  108.83,102.59 90 top
C150  10uF  [0402-TIGHT]  110.03,87.59 180 top
C151  0.1uF  [0402-TIGHT]  111.43,122.19 0 top
C152  1.0nF  [0402-TIGHT]  116.79,102.89 180 top
C153  1.0nF  [0402-TIGHT]  116.13,99.79 0 top
C154  0.1uF  [0402-TIGHT]  121.33,90.69 180 top
C155  0.1uF  [0402-TIGHT]  118.73,139.99 0 top
C156  0.1uF  [0402-TIGHT]  118.73,138.99 0 top
C157  0.1uF  [0402-TIGHT]  109.23,110.29 90 top
C158  0.1uF  [0402-TIGHT]  107.53,107.39 180 top
C159  0.1uF  [0402-TIGHT]  111.03,115.79 0 top
C160  0.1uF  [0402-TIGHT]  113.23,115.79 180 top
CHG  JUMPER-SMT_2_NC_TRACE_SILK  [SMT-JUMPER_2_NC_TRACE_SILK]  18.66,32 90 bottom
CHG1  JUMPER-SMT_2_NC_TRACE_SILK  [SMT-JUMPER_2_NC_TRACE_SILK]  42.03,32 90 bottom
CHG2  JUMPER-SMT_2_NC_TRACE_SILK  [SMT-JUMPER_2_NC_TRACE_SILK]  65.39,32 90 bottom
CHG3  JUMPER-SMT_2_NC_TRACE_SILK  [SMT-JUMPER_2_NC_TRACE_SILK]  88.76,32 90 bottom
CHG4  JUMPER-SMT_2_NC_TRACE_SILK  [SMT-JUMPER_2_NC_TRACE_SILK]  112.13,32 90 bottom
CHG5  JUMPER-SMT_2_NC_TRACE_SILK  [SMT-JUMPER_2_NC_TRACE_SILK]  18.66,101.09 90 bottom
CHG6  JUMPER-SMT_2_NC_TRACE_SILK  [SMT-JUMPER_2_NC_TRACE_SILK]  42.03,101.09 90 bottom
CHG7  JUMPER-SMT_2_NC_TRACE_SILK  [SMT-JUMPER_2_NC_TRACE_SILK]  65.39,101.09 90 bottom
CHG8  JUMPER-SMT_2_NC_TRACE_SILK  [SMT-JUMPER_2_NC_TRACE_SILK]  88.76,101.09 90 bottom
CHG9  JUMPER-SMT_2_NC_TRACE_SILK  [SMT-JUMPER_2_NC_TRACE_SILK]  112.13,101.09 90 bottom
D1  WS2812  [WS2812-2020]  18.29,55.53 0 top
D2  BLUE  [LED-0603]  14.51,55.14 90 top
D3  3A/10V/280mV  [SOD-323]  21.04,33.8 270 top
D4  RED  [LED-0603]  22.56,55.14 90 top
D5  Yellow  [LED-0603]  18.06,30.1 0 top
D6  Yellow  [LED-0603]  41.43,30.1 0 top
D7  3A/10V/280mV  [SOD-323]  44.41,33.8 270 top
D8  WS2812  [WS2812-2020]  41.66,55.53 0 top
D9  BLUE  [LED-0603]  37.88,55.14 90 top
D10  RED  [LED-0603]  45.93,55.14 90 top
D11  Yellow  [LED-0603]  64.79,30.1 0 top
D12  3A/10V/280mV  [SOD-323]  67.77,33.8 270 top
D13  WS2812  [WS2812-2020]  65.02,55.53 0 top
D14  BLUE  [LED-0603]  61.24,55.14 90 top
D15  RED  [LED-0603]  69.29,55.14 90 top
D16  Yellow  [LED-0603]  88.16,30.1 0 top
D17  3A/10V/280mV  [SOD-323]  91.14,33.8 270 top
D18  WS2812  [WS2812-2020]  88.39,55.53 0 top
D19  BLUE  [LED-0603]  84.61,55.14 90 top
D20  RED  [LED-0603]  92.66,55.14 90 top
D21  Yellow  [LED-0603]  111.53,30.1 0 top
D22  3A/10V/280mV  [SOD-323]  114.51,33.8 270 top
D23  WS2812  [WS2812-2020]  111.76,55.53 0 top
D24  BLUE  [LED-0603]  107.98,55.14 90 top
D25  RED  [LED-0603]  116.03,55.14 90 top
D26  Yellow  [LED-0603]  18.06,99.19 0 top
D27  3A/10V/280mV  [SOD-323]  21.04,102.89 270 top
D28  WS2812  [WS2812-2020]  18.29,124.62 0 top
D29  BLUE  [LED-0603]  14.51,124.23 90 top
D30  RED  [LED-0603]  22.56,124.23 90 top
D31  Yellow  [LED-0603]  41.43,99.19 0 top
D32  3A/10V/280mV  [SOD-323]  44.41,102.89 270 top
D33  WS2812  [WS2812-2020]  41.66,124.62 0 top
D34  BLUE  [LED-0603]  37.88,124.23 90 top
D35  RED  [LED-0603]  45.93,124.23 90 top
D36  Yellow  [LED-0603]  64.79,99.19 0 top
D37  3A/10V/280mV  [SOD-323]  67.77,102.89 270 top
D38  WS2812  [WS2812-2020]  65.02,124.62 0 top
D39  BLUE  [LED-0603]  61.24,124.23 90 top
D40  RED  [LED-0603]  69.29,124.23 90 top
D41  Yellow  [LED-0603]  88.16,99.19 0 top
D42  3A/10V/280mV  [SOD-323]  91.14,102.89 270 top
D43  WS2812  [WS2812-2020]  88.39,124.62 0 top
D44  BLUE  [LED-0603]  84.61,124.23 90 top
D45  RED  [LED-0603]  92.66,124.23 90 top
D46  Yellow  [LED-0603]  111.53,99.19 0 top
D47  3A/10V/280mV  [SOD-323]  114.51,102.89 270 top
D48  WS2812  [WS2812-2020]  111.76,124.62 0 top
D49  BLUE  [LED-0603]  107.98,124.23 90 top
D50  RED  [LED-0603]  116.03,124.23 90 top
E$1  [FIDUCIAL-1X2]  4.23,144.4 0 top
E$2  [FIDUCIAL-1X2]  4.23,144.4 0 bottom
E$3  [FIDUCIAL-1X2]  125.81,144.4 0 top
E$4  [FIDUCIAL-1X2]  125.81,144.4 0 bottom
E$5  [FIDUCIAL-1.5X3]  4.23,15.75 0 top
E$6  [FIDUCIAL-1.5X3]  4.23,15.75 0 bottom
FB1  120Ω  [0402]  23.26,32.2 0 top
FB2  120Ω  [0402]  46.63,32.2 0 top
FB3  120Ω  [0402]  69.99,32.2 0 top
FB4  120Ω  [0402]  93.36,32.2 0 top
FB5  120Ω  [0402]  116.73,32.2 0 top
FB6  120Ω  [0402]  23.26,101.29 0 top
FB7  120Ω  [0402]  46.63,101.29 0 top
FB8  120Ω  [0402]  69.99,101.29 0 top
FB9  120Ω  [0402]  93.36,101.29 0 top
FB10  120Ω  [0402]  116.73,101.29 0 top
FD1  FIDUCIALUFIDUCIAL  [FIDUCIAL-MICRO]  28.96,14.7 0 top
FD2  FIDUCIALUFIDUCIAL  [FIDUCIAL-MICRO]  7.46,62.8 0 top
FD3  FIDUCIALUFIDUCIAL  [FIDUCIAL-MICRO]  28.96,14.7 0 bottom
FD4  FIDUCIALUFIDUCIAL  [FIDUCIAL-MICRO]  7.46,62.8 0 bottom
FD5  FIDUCIALUFIDUCIAL  [FIDUCIAL-MICRO]  30.83,62.8 0 top
FD6  FIDUCIALUFIDUCIAL  [FIDUCIAL-MICRO]  30.83,62.8 0 bottom
FD7  FIDUCIALUFIDUCIAL  [FIDUCIAL-MICRO]  52.33,14.7 0 bottom
FD8  FIDUCIALUFIDUCIAL  [FIDUCIAL-MICRO]  52.33,14.7 0 top
FD9  FIDUCIALUFIDUCIAL  [FIDUCIAL-MICRO]  54.19,62.8 0 top
FD10  FIDUCIALUFIDUCIAL  [FIDUCIAL-MICRO]  54.19,62.8 0 bottom
FD11  FIDUCIALUFIDUCIAL  [FIDUCIAL-MICRO]  75.69,14.7 0 bottom
FD12  FIDUCIALUFIDUCIAL  [FIDUCIAL-MICRO]  75.69,14.7 0 top
FD13  FIDUCIALUFIDUCIAL  [FIDUCIAL-MICRO]  77.56,62.8 0 top
FD14  FIDUCIALUFIDUCIAL  [FIDUCIAL-MICRO]  77.56,62.8 0 bottom
FD15  FIDUCIALUFIDUCIAL  [FIDUCIAL-MICRO]  99.06,14.7 0 bottom
FD16  FIDUCIALUFIDUCIAL  [FIDUCIAL-MICRO]  99.06,14.7 0 top
FD17  FIDUCIALUFIDUCIAL  [FIDUCIAL-MICRO]  100.93,62.8 0 top
FD18  FIDUCIALUFIDUCIAL  [FIDUCIAL-MICRO]  100.93,62.8 0 bottom
FD19  FIDUCIALUFIDUCIAL  [FIDUCIAL-MICRO]  122.43,14.7 0 bottom
FD20  FIDUCIALUFIDUCIAL  [FIDUCIAL-MICRO]  122.43,14.7 0 top
FD21  FIDUCIALUFIDUCIAL  [FIDUCIAL-MICRO]  7.46,131.89 0 top
FD22  FIDUCIALUFIDUCIAL  [FIDUCIAL-MICRO]  7.46,131.89 0 bottom
FD23  FIDUCIALUFIDUCIAL  [FIDUCIAL-MICRO]  28.96,83.79 0 bottom
FD24  FIDUCIALUFIDUCIAL  [FIDUCIAL-MICRO]  28.96,83.79 0 top
FD25  FIDUCIALUFIDUCIAL  [FIDUCIAL-MICRO]  30.83,131.89 0 top
FD26  FIDUCIALUFIDUCIAL  [FIDUCIAL-MICRO]  30.83,131.89 0 bottom
FD27  FIDUCIALUFIDUCIAL  [FIDUCIAL-MICRO]  52.33,83.79 0 bottom
FD28  FIDUCIALUFIDUCIAL  [FIDUCIAL-MICRO]  52.33,83.79 0 top
FD29  FIDUCIALUFIDUCIAL  [FIDUCIAL-MICRO]  54.19,131.89 0 top
FD30  FIDUCIALUFIDUCIAL  [FIDUCIAL-MICRO]  54.19,131.89 0 bottom
FD31  FIDUCIALUFIDUCIAL  [FIDUCIAL-MICRO]  75.69,83.79 0 bottom
FD32  FIDUCIALUFIDUCIAL  [FIDUCIAL-MICRO]  75.69,83.79 0 top
FD33  FIDUCIALUFIDUCIAL  [FIDUCIAL-MICRO]  77.56,131.89 0 top
FD34  FIDUCIALUFIDUCIAL  [FIDUCIAL-MICRO]  77.56,131.89 0 bottom
FD35  FIDUCIALUFIDUCIAL  [FIDUCIAL-MICRO]  99.06,83.79 0 bottom
FD36  FIDUCIALUFIDUCIAL  [FIDUCIAL-MICRO]  99.06,83.79 0 top
FD37  FIDUCIALUFIDUCIAL  [FIDUCIAL-MICRO]  100.93,131.89 0 top
FD38  FIDUCIALUFIDUCIAL  [FIDUCIAL-MICRO]  100.93,131.89 0 bottom
FD39  FIDUCIALUFIDUCIAL  [FIDUCIAL-MICRO]  122.43,83.79 0 bottom
FD40  FIDUCIALUFIDUCIAL  [FIDUCIAL-MICRO]  122.43,83.79 0 top
H1  STAND-OFFTIGHT  [STAND-OFF-TIGHT]  27.18,65.28 0 top
H2  STAND-OFFTIGHT  [STAND-OFF-TIGHT]  9.4,65.28 0 top
H3  STAND-OFFTIGHT  [STAND-OFF-TIGHT]  27.18,11.94 0 top
H4  STAND-OFFTIGHT  [STAND-OFF-TIGHT]  9.4,11.94 0 top
H5  STAND-OFFTIGHT  [STAND-OFF-TIGHT]  32.77,11.94 0 top
H6  STAND-OFFTIGHT  [STAND-OFF-TIGHT]  50.55,11.94 0 top
H7  STAND-OFFTIGHT  [STAND-OFF-TIGHT]  50.55,65.28 0 top
H8  STAND-OFFTIGHT  [STAND-OFF-TIGHT]  32.77,65.28 0 top
H9  STAND-OFFTIGHT  [STAND-OFF-TIGHT]  56.13,11.94 0 top
H10  STAND-OFFTIGHT  [STAND-OFF-TIGHT]  73.91,11.94 0 top
H11  STAND-OFFTIGHT  [STAND-OFF-TIGHT]  73.91,65.28 0 top
H12  STAND-OFFTIGHT  [STAND-OFF-TIGHT]  56.13,65.28 0 top
H13  STAND-OFFTIGHT  [STAND-OFF-TIGHT]  79.5,11.94 0 top
H14  STAND-OFFTIGHT  [STAND-OFF-TIGHT]  97.28,11.94 0 top
H15  STAND-OFFTIGHT  [STAND-OFF-TIGHT]  97.28,65.28 0 top
H16  STAND-OFFTIGHT  [STAND-OFF-TIGHT]  79.5,65.28 0 top
H17  STAND-OFFTIGHT  [STAND-OFF-TIGHT]  102.87,11.94 0 top
H18  STAND-OFFTIGHT  [STAND-OFF-TIGHT]  120.65,11.94 0 top
H19  STAND-OFFTIGHT  [STAND-OFF-TIGHT]  120.65,65.28 0 top
H20  STAND-OFFTIGHT  [STAND-OFF-TIGHT]  102.87,65.28 0 top
H21  STAND-OFFTIGHT  [STAND-OFF-TIGHT]  9.4,81.03 0 top
H22  STAND-OFFTIGHT  [STAND-OFF-TIGHT]  27.18,81.03 0 top
H23  STAND-OFFTIGHT  [STAND-OFF-TIGHT]  27.18,134.37 0 top
H24  STAND-OFFTIGHT  [STAND-OFF-TIGHT]  9.4,134.37 0 top
H25  STAND-OFFTIGHT  [STAND-OFF-TIGHT]  32.77,81.03 0 top
H26  STAND-OFFTIGHT  [STAND-OFF-TIGHT]  50.55,81.03 0 top
H27  STAND-OFFTIGHT  [STAND-OFF-TIGHT]  50.55,134.37 0 top
H28  STAND-OFFTIGHT  [STAND-OFF-TIGHT]  32.77,134.37 0 top
H29  STAND-OFFTIGHT  [STAND-OFF-TIGHT]  56.13,81.03 0 top
H30  STAND-OFFTIGHT  [STAND-OFF-TIGHT]  73.91,81.03 0 top
H31  STAND-OFFTIGHT  [STAND-OFF-TIGHT]  73.91,134.37 0 top
H32  STAND-OFFTIGHT  [STAND-OFF-TIGHT]  56.13,134.37 0 top
H33  STAND-OFFTIGHT  [STAND-OFF-TIGHT]  79.5,81.03 0 top
H34  STAND-OFFTIGHT  [STAND-OFF-TIGHT]  97.28,81.03 0 top
H35  STAND-OFFTIGHT  [STAND-OFF-TIGHT]  97.28,134.37 0 top
H36  STAND-OFFTIGHT  [STAND-OFF-TIGHT]  79.5,134.37 0 top
H37  STAND-OFFTIGHT  [STAND-OFF-TIGHT]  102.87,81.03 0 top
H38  STAND-OFFTIGHT  [STAND-OFF-TIGHT]  120.65,81.03 0 top
H39  STAND-OFFTIGHT  [STAND-OFF-TIGHT]  120.65,134.37 0 top
H40  STAND-OFFTIGHT  [STAND-OFF-TIGHT]  102.87,134.37 0 top
I2C  JUMPER-SMT_3_2-NC_TRACE_SILK  [SMT-JUMPER_3_2-NC_TRACE_SILK]  10.76,60.1 270 bottom
I2C1  JUMPER-SMT_3_2-NC_TRACE_SILK  [SMT-JUMPER_3_2-NC_TRACE_SILK]  34.13,60.1 270 bottom
I2C2  JUMPER-SMT_3_2-NC_TRACE_SILK  [SMT-JUMPER_3_2-NC_TRACE_SILK]  57.49,60.1 270 bottom
I2C3  JUMPER-SMT_3_2-NC_TRACE_SILK  [SMT-JUMPER_3_2-NC_TRACE_SILK]  80.86,60.1 270 bottom
I2C4  JUMPER-SMT_3_2-NC_TRACE_SILK  [SMT-JUMPER_3_2-NC_TRACE_SILK]  104.23,60.1 270 bottom
I2C5  JUMPER-SMT_3_2-NC_TRACE_SILK  [SMT-JUMPER_3_2-NC_TRACE_SILK]  10.76,129.19 270 bottom
I2C6  JUMPER-SMT_3_2-NC_TRACE_SILK  [SMT-JUMPER_3_2-NC_TRACE_SILK]  34.13,129.19 270 bottom
I2C7  JUMPER-SMT_3_2-NC_TRACE_SILK  [SMT-JUMPER_3_2-NC_TRACE_SILK]  57.49,129.19 270 bottom
I2C8  JUMPER-SMT_3_2-NC_TRACE_SILK  [SMT-JUMPER_3_2-NC_TRACE_SILK]  80.86,129.19 270 bottom
I2C9  JUMPER-SMT_3_2-NC_TRACE_SILK  [SMT-JUMPER_3_2-NC_TRACE_SILK]  104.23,129.19 270 bottom
J1  USB-C  [USB-C-16P-4LAYER-ISOLATED]  18.29,15.6 0 top
J2  THING_PLUS_LOGICAL  [THING_PLUS]  6.86,9.4 0 top
J3  CONN_03X2_NO4  [PAD_05_03X2_TP_NO4]  20.39,69.56 180 bottom
J4  MICRO-SDFRICTION  [MICROSD_TINY]  19,20.2 0 bottom
J5  [JST-2-SMD]  10.41,27.18 90 top
J6  QWIIC_RA  [JST04_1MM_RA]  11.94,18.29 270 top
J7  THING_PLUS_LOGICAL  [THING_PLUS]  30.23,9.4 0 top
J8  USB-C  [USB-C-16P-4LAYER-ISOLATED]  41.66,15.6 0 top
J9  [JST-2-SMD]  33.78,27.18 90 top
J10  MICRO-SDFRICTION  [MICROSD_TINY]  42.37,20.2 0 bottom
J11  CONN_03X2_NO4  [PAD_05_03X2_TP_NO4]  43.76,69.56 180 bottom
J12  QWIIC_RA  [JST04_1MM_RA]  35.31,18.29 270 top
J13  THING_PLUS_LOGICAL  [THING_PLUS]  53.59,9.4 0 top
J14  USB-C  [USB-C-16P-4LAYER-ISOLATED]  65.02,15.6 0 top
J15  [JST-2-SMD]  57.15,27.18 90 top
J16  MICRO-SDFRICTION  [MICROSD_TINY]  65.74,20.2 0 bottom
J17  CONN_03X2_NO4  [PAD_05_03X2_TP_NO4]  67.12,69.56 180 bottom
J18  QWIIC_RA  [JST04_1MM_RA]  58.67,18.29 270 top
J19  THING_PLUS_LOGICAL  [THING_PLUS]  76.96,9.4 0 top
J20  USB-C  [USB-C-16P-4LAYER-ISOLATED]  88.39,15.6 0 top
J21  [JST-2-SMD]  80.52,27.18 90 top
J22  MICRO-SDFRICTION  [MICROSD_TINY]  89.1,20.2 0 bottom
J23  CONN_03X2_NO4  [PAD_05_03X2_TP_NO4]  90.49,69.56 180 bottom
J24  QWIIC_RA  [JST04_1MM_RA]  82.04,18.29 270 top
J25  THING_PLUS_LOGICAL  [THING_PLUS]  100.33,9.4 0 top
J26  USB-C  [USB-C-16P-4LAYER-ISOLATED]  111.76,15.6 0 top
J27  [JST-2-SMD]  103.89,27.18 90 top
J28  MICRO-SDFRICTION  [MICROSD_TINY]  112.47,20.2 0 bottom
J29  CONN_03X2_NO4  [PAD_05_03X2_TP_NO4]  113.86,69.56 180 bottom
J30  QWIIC_RA  [JST04_1MM_RA]  105.41,18.29 270 top
J31  THING_PLUS_LOGICAL  [THING_PLUS]  6.86,78.49 0 top
J32  USB-C  [USB-C-16P-4LAYER-ISOLATED]  18.29,84.68 0 top
J33  [JST-2-SMD]  10.41,96.27 90 top
J34  MICRO-SDFRICTION  [MICROSD_TINY]  19,89.29 0 bottom
J35  CONN_03X2_NO4  [PAD_05_03X2_TP_NO4]  20.39,138.65 180 bottom
J36  QWIIC_RA  [JST04_1MM_RA]  11.94,87.38 270 top
J37  THING_PLUS_LOGICAL  [THING_PLUS]  30.23,78.49 0 top
J38  USB-C  [USB-C-16P-4LAYER-ISOLATED]  41.66,84.68 0 top
J39  [JST-2-SMD]  33.78,96.27 90 top
J40  MICRO-SDFRICTION  [MICROSD_TINY]  42.37,89.29 0 bottom
J41  CONN_03X2_NO4  [PAD_05_03X2_TP_NO4]  43.76,138.65 180 bottom
J42  QWIIC_RA  [JST04_1MM_RA]  35.31,87.38 270 top
J43  THING_PLUS_LOGICAL  [THING_PLUS]  53.59,78.49 0 top
J44  USB-C  [USB-C-16P-4LAYER-ISOLATED]  65.02,84.68 0 top
J45  [JST-2-SMD]  57.15,96.27 90 top
J46  MICRO-SDFRICTION  [MICROSD_TINY]  65.74,89.29 0 bottom
J47  CONN_03X2_NO4  [PAD_05_03X2_TP_NO4]  67.12,138.65 180 bottom
J48  QWIIC_RA  [JST04_1MM_RA]  58.67,87.38 270 top
J49  THING_PLUS_LOGICAL  [THING_PLUS]  76.96,78.49 0 top
J50  USB-C  [USB-C-16P-4LAYER-ISOLATED]  88.39,84.68 0 top
J51  [JST-2-SMD]  80.52,96.27 90 top
J52  MICRO-SDFRICTION  [MICROSD_TINY]  89.1,89.29 0 bottom
J53  CONN_03X2_NO4  [PAD_05_03X2_TP_NO4]  90.49,138.65 180 bottom
J54  QWIIC_RA  [JST04_1MM_RA]  82.04,87.38 270 top
J55  THING_PLUS_LOGICAL  [THING_PLUS]  100.33,78.49 0 top
J56  USB-C  [USB-C-16P-4LAYER-ISOLATED]  111.76,84.68 0 top
J57  [JST-2-SMD]  103.89,96.27 90 top
J58  MICRO-SDFRICTION  [MICROSD_TINY]  112.47,89.29 0 bottom
J59  CONN_03X2_NO4  [PAD_05_03X2_TP_NO4]  113.86,138.65 180 bottom
J60  QWIIC_RA  [JST04_1MM_RA]  105.41,87.38 270 top
LOGO1  SFE_LOGO_NAME_FLAME.1_INCH  [SFE_LOGO_NAME_FLAME_.1]  18.19,42.62 0 bottom
LOGO2  FOUR_LAYER_WARNING  [FOUR_LAYER_WARNING]  43.66,62.9 0 top
LOGO3  SPECIAL_INSTRUCTIONS-ORDERING  [ORDERING_INSTRUCTIONS]  42.08,74.72 0 top
LOGO4  QWIIC_LOGO_4MM  [QWIIC_4MM]  13.64,18.34 90 top
LOGO5  OSHW-LOGOMINI  [OSHW-LOGO-MINI]  11.4,70.46 0 top
LOGO6  SFE_LOGO_NAME_FLAME.1_INCH  [SFE_LOGO_NAME_FLAME_.1]  41.56,42.62 0 bottom
LOGO7  OSHW-LOGOMINI  [OSHW-LOGO-MINI]  34.77,70.46 0 top
LOGO8  SPECIAL_INSTRUCTIONS-ORDERING  [ORDERING_INSTRUCTIONS]  65.45,74.72 0 top
LOGO9  QWIIC_LOGO_4MM  [QWIIC_4MM]  37.01,18.34 90 top
LOGO10  FOUR_LAYER_WARNING  [FOUR_LAYER_WARNING]  67.03,62.9 0 top
LOGO11  SFE_LOGO_NAME_FLAME.1_INCH  [SFE_LOGO_NAME_FLAME_.1]  64.92,42.62 0 bottom
LOGO12  OSHW-LOGOMINI  [OSHW-LOGO-MINI]  58.13,70.46 0 top
LOGO13  SPECIAL_INSTRUCTIONS-ORDERING  [ORDERING_INSTRUCTIONS]  88.81,74.72 0 top
LOGO14  QWIIC_LOGO_4MM  [QWIIC_4MM]  60.37,18.34 90 top
LOGO15  FOUR_LAYER_WARNING  [FOUR_LAYER_WARNING]  90.39,62.9 0 top
LOGO16  SFE_LOGO_NAME_FLAME.1_INCH  [SFE_LOGO_NAME_FLAME_.1]  88.29,42.62 0 bottom
LOGO17  OSHW-LOGOMINI  [OSHW-LOGO-MINI]  81.5,70.46 0 top
LOGO18  SPECIAL_INSTRUCTIONS-ORDERING  [ORDERING_INSTRUCTIONS]  112.18,74.72 0 top
LOGO19  QWIIC_LOGO_4MM  [QWIIC_4MM]  83.74,18.34 90 top
LOGO20  FOUR_LAYER_WARNING  [FOUR_LAYER_WARNING]  113.76,62.9 0 top
LOGO21  SFE_LOGO_NAME_FLAME.1_INCH  [SFE_LOGO_NAME_FLAME_.1]  111.66,42.62 0 bottom
LOGO22  OSHW-LOGOMINI  [OSHW-LOGO-MINI]  104.87,70.46 0 top
LOGO23  SPECIAL_INSTRUCTIONS-ORDERING  [ORDERING_INSTRUCTIONS]  135.55,74.72 0 top  (outside the outline)
LOGO24  QWIIC_LOGO_4MM  [QWIIC_4MM]  107.11,18.34 90 top
LOGO25  FOUR_LAYER_WARNING  [FOUR_LAYER_WARNING]  137.13,62.9 0 top  (outside the outline)
LOGO26  SFE_LOGO_NAME_FLAME.1_INCH  [SFE_LOGO_NAME_FLAME_.1]  18.19,111.71 0 bottom
LOGO27  OSHW-LOGOMINI  [OSHW-LOGO-MINI]  11.4,139.55 0 top
LOGO28  SPECIAL_INSTRUCTIONS-ORDERING  [ORDERING_INSTRUCTIONS]  42.08,143.81 0 top
LOGO29  QWIIC_LOGO_4MM  [QWIIC_4MM]  13.64,87.43 90 top
LOGO30  FOUR_LAYER_WARNING  [FOUR_LAYER_WARNING]  43.66,131.99 0 top
LOGO31  SFE_LOGO_NAME_FLAME.1_INCH  [SFE_LOGO_NAME_FLAME_.1]  41.56,111.71 0 bottom
LOGO32  OSHW-LOGOMINI  [OSHW-LOGO-MINI]  34.77,139.55 0 top
LOGO33  SPECIAL_INSTRUCTIONS-ORDERING  [ORDERING_INSTRUCTIONS]  65.45,143.81 0 top
LOGO34  QWIIC_LOGO_4MM  [QWIIC_4MM]  37.01,87.43 90 top
LOGO35  FOUR_LAYER_WARNING  [FOUR_LAYER_WARNING]  67.03,131.99 0 top
LOGO36  SFE_LOGO_NAME_FLAME.1_INCH  [SFE_LOGO_NAME_FLAME_.1]  64.92,111.71 0 bottom
LOGO37  OSHW-LOGOMINI  [OSHW-LOGO-MINI]  58.13,139.55 0 top
LOGO38  SPECIAL_INSTRUCTIONS-ORDERING  [ORDERING_INSTRUCTIONS]  88.81,143.81 0 top
LOGO39  QWIIC_LOGO_4MM  [QWIIC_4MM]  60.37,87.43 90 top
LOGO40  FOUR_LAYER_WARNING  [FOUR_LAYER_WARNING]  90.39,131.99 0 top
LOGO41  SFE_LOGO_NAME_FLAME.1_INCH  [SFE_LOGO_NAME_FLAME_.1]  88.29,111.71 0 bottom
LOGO42  OSHW-LOGOMINI  [OSHW-LOGO-MINI]  81.5,139.55 0 top
LOGO43  SPECIAL_INSTRUCTIONS-ORDERING  [ORDERING_INSTRUCTIONS]  112.18,143.81 0 top
LOGO44  QWIIC_LOGO_4MM  [QWIIC_4MM]  83.74,87.43 90 top
LOGO45  FOUR_LAYER_WARNING  [FOUR_LAYER_WARNING]  113.76,131.99 0 top
LOGO46  SFE_LOGO_NAME_FLAME.1_INCH  [SFE_LOGO_NAME_FLAME_.1]  111.66,111.71 0 bottom
LOGO47  OSHW-LOGOMINI  [OSHW-LOGO-MINI]  104.87,139.55 0 top
LOGO48  SPECIAL_INSTRUCTIONS-ORDERING  [ORDERING_INSTRUCTIONS]  135.55,143.81 0 top  (outside the outline)
LOGO49  QWIIC_LOGO_4MM  [QWIIC_4MM]  107.11,87.43 90 top
LOGO50  FOUR_LAYER_WARNING  [FOUR_LAYER_WARNING]  137.13,131.99 0 top  (outside the outline)
MEAS  JUMPER-COMBO_2_NC_TRACE  [COMBO-JUMPER_2_NC_TRACE]  21.06,38.2 90 top
MEAS1  JUMPER-COMBO_2_NC_TRACE  [COMBO-JUMPER_2_NC_TRACE]  44.43,38.2 90 top
MEAS2  JUMPER-COMBO_2_NC_TRACE  [COMBO-JUMPER_2_NC_TRACE]  67.79,38.2 90 top
MEAS3  JUMPER-COMBO_2_NC_TRACE  [COMBO-JUMPER_2_NC_TRACE]  91.16,38.2 90 top
MEAS4  JUMPER-COMBO_2_NC_TRACE  [COMBO-JUMPER_2_NC_TRACE]  114.53,38.2 90 top
MEAS5  JUMPER-COMBO_2_NC_TRACE  [COMBO-JUMPER_2_NC_TRACE]  21.06,107.29 90 top
MEAS6  JUMPER-COMBO_2_NC_TRACE  [COMBO-JUMPER_2_NC_TRACE]  44.43,107.29 90 top
MEAS7  JUMPER-COMBO_2_NC_TRACE  [COMBO-JUMPER_2_NC_TRACE]  67.79,107.29 90 top
MEAS8  JUMPER-COMBO_2_NC_TRACE  [COMBO-JUMPER_2_NC_TRACE]  91.16,107.29 90 top
MEAS9  JUMPER-COMBO_2_NC_TRACE  [COMBO-JUMPER_2_NC_TRACE]  114.53,107.29 90 top
PWR  JUMPER-SMT_2_NC_TRACE_SILK  [SMT-JUMPER_2_NC_TRACE_SILK]  18.46,51.9 0 bottom
PWR1  JUMPER-SMT_2_NC_TRACE_SILK  [SMT-JUMPER_2_NC_TRACE_SILK]  41.83,51.9 0 bottom
PWR2  JUMPER-SMT_2_NC_TRACE_SILK  [SMT-JUMPER_2_NC_TRACE_SILK]  65.19,51.9 0 bottom
PWR3  JUMPER-SMT_2_NC_TRACE_SILK  [SMT-JUMPER_2_NC_TRACE_SILK]  88.56,51.9 0 bottom
PWR4  JUMPER-SMT_2_NC_TRACE_SILK  [SMT-JUMPER_2_NC_TRACE_SILK]  111.93,51.9 0 bottom
PWR5  JUMPER-SMT_2_NC_TRACE_SILK  [SMT-JUMPER_2_NC_TRACE_SILK]  18.46,120.99 0 bottom
PWR6  JUMPER-SMT_2_NC_TRACE_SILK  [SMT-JUMPER_2_NC_TRACE_SILK]  41.83,120.99 0 bottom
PWR7  JUMPER-SMT_2_NC_TRACE_SILK  [SMT-JUMPER_2_NC_TRACE_SILK]  65.19,120.99 0 bottom
PWR8  JUMPER-SMT_2_NC_TRACE_SILK  [SMT-JUMPER_2_NC_TRACE_SILK]  88.56,120.99 0 bottom
PWR9  JUMPER-SMT_2_NC_TRACE_SILK  [SMT-JUMPER_2_NC_TRACE_SILK]  111.93,120.99 0 bottom
Q1  20V/4.2A/52mΩ/1.4W  [SOT23-3]  18.06,33.8 90 top
Q2  20V/4.2A/52mΩ/1.4W  [SOT23-3]  41.43,33.8 90 top
Q3  20V/4.2A/52mΩ/1.4W  [SOT23-3]  64.79,33.8 90 top
Q4  20V/4.2A/52mΩ/1.4W  [SOT23-3]  88.16,33.8 90 top
Q5  20V/4.2A/52mΩ/1.4W  [SOT23-3]  111.53,33.8 90 top
Q6  20V/4.2A/52mΩ/1.4W  [SOT23-3]  18.06,102.89 90 top
Q7  20V/4.2A/52mΩ/1.4W  [SOT23-3]  41.43,102.89 90 top
Q8  20V/4.2A/52mΩ/1.4W  [SOT23-3]  64.79,102.89 90 top
Q9  20V/4.2A/52mΩ/1.4W  [SOT23-3]  88.16,102.89 90 top
Q10  20V/4.2A/52mΩ/1.4W  [SOT23-3]  111.53,102.89 90 top
R1  5.1k  [0402-TIGHT]  24.26,14.7 270 top
R2  5.1k  [0402-TIGHT]  16.54,16.92 0 top
R3  10k  [0402-TIGHT]  22.66,29.5 180 top
R4  2.2k  [0402-TIGHT]  14.36,52.8 180 top
R5  2.2k  [0402-TIGHT]  10.39,57.84 0 top
R6  10k  [0402-TIGHT]  23.81,37.8 270 top
R7  2.2k  [0402-TIGHT]  10.49,60.2 0 top
R8  1k  [0402-TIGHT]  22.06,52.8 180 top
R9  4.7k  [0402-TIGHT]  18.06,31.4 0 top
R10  2.0K  [0402-TIGHT]  24.56,29 270 top
R11  5.1k  [0402-TIGHT]  47.63,14.7 270 top
R12  5.1k  [0402-TIGHT]  39.91,16.92 0 top
R13  4.7k  [0402-TIGHT]  41.43,31.4 0 top
R14  10k  [0402-TIGHT]  20.31,51.6 180 top
R15  10k  [0402-TIGHT]  14.06,37.3 180 top
R16  10k  [0402-TIGHT]  15.96,49.26 270 top
R17  2.0K  [0402-TIGHT]  47.93,29 270 top
R18  10k  [0402-TIGHT]  46.03,29.5 180 top
R19  10k  [0402-TIGHT]  47.18,37.8 270 top
R20  2.2k  [0402-TIGHT]  33.76,57.84 0 top
R21  2.2k  [0402-TIGHT]  33.86,60.2 0 top
R22  2.2k  [0402-TIGHT]  37.73,52.8 180 top
R23  10k  [0402-TIGHT]  37.43,37.3 180 top
R24  10k  [0402-TIGHT]  43.68,51.6 180 top
R25  10k  [0402-TIGHT]  39.33,49.26 270 top
R26  1k  [0402-TIGHT]  45.43,52.8 180 top
R27  5.1k  [0402-TIGHT]  70.99,14.7 270 top
R28  5.1k  [0402-TIGHT]  63.27,16.92 0 top
R29  4.7k  [0402-TIGHT]  64.79,31.4 0 top
R30  2.0K  [0402-TIGHT]  71.29,29 270 top
R31  10k  [0402-TIGHT]  69.39,29.5 180 top
R32  10k  [0402-TIGHT]  70.54,37.8 270 top
R33  2.2k  [0402-TIGHT]  57.12,57.84 0 top
R34  2.2k  [0402-TIGHT]  57.22,60.2 0 top
R35  2.2k  [0402-TIGHT]  61.09,52.8 180 top
R36  10k  [0402-TIGHT]  60.79,37.3 180 top
R37  10k  [0402-TIGHT]  67.04,51.6 180 top
R38  10k  [0402-TIGHT]  62.69,49.26 270 top
R39  1k  [0402-TIGHT]  68.79,52.8 180 top
R40  5.1k  [0402-TIGHT]  94.36,14.7 270 top
R41  5.1k  [0402-TIGHT]  86.64,16.92 0 top
R42  4.7k  [0402-TIGHT]  88.16,31.4 0 top
R43  2.0K  [0402-TIGHT]  94.66,29 270 top
R44  10k  [0402-TIGHT]  92.76,29.5 180 top
R45  10k  [0402-TIGHT]  93.91,37.8 270 top
R46  2.2k  [0402-TIGHT]  80.49,57.84 0 top
R47  2.2k  [0402-TIGHT]  80.59,60.2 0 top
R48  2.2k  [0402-TIGHT]  84.46,52.8 180 top
R49  10k  [0402-TIGHT]  84.16,37.3 180 top
R50  10k  [0402-TIGHT]  90.41,51.6 180 top
R51  10k  [0402-TIGHT]  86.06,49.26 270 top
R52  1k  [0402-TIGHT]  92.16,52.8 180 top
R53  5.1k  [0402-TIGHT]  117.73,14.7 270 top
R54  5.1k  [0402-TIGHT]  110.01,16.92 0 top
R55  4.7k  [0402-TIGHT]  111.53,31.4 0 top
R56  2.0K  [0402-TIGHT]  118.03,29 270 top
R57  10k  [0402-TIGHT]  116.13,29.5 180 top
R58  10k  [0402-TIGHT]  117.28,37.8 270 top
R59  2.2k  [0402-TIGHT]  103.86,57.84 0 top
R60  2.2k  [0402-TIGHT]  103.96,60.2 0 top
R61  2.2k  [0402-TIGHT]  107.83,52.8 180 top
R62  10k  [0402-TIGHT]  107.53,37.3 180 top
R63  10k  [0402-TIGHT]  113.78,51.6 180 top
R64  10k  [0402-TIGHT]  109.43,49.26 270 top
R65  1k  [0402-TIGHT]  115.53,52.8 180 top
R66  5.1k  [0402-TIGHT]  24.26,83.79 270 top
R67  5.1k  [0402-TIGHT]  16.54,86.01 0 top
R68  4.7k  [0402-TIGHT]  18.06,100.49 0 top
R69  2.0K  [0402-TIGHT]  24.56,98.09 270 top
R70  10k  [0402-TIGHT]  22.66,98.59 180 top
R71  10k  [0402-TIGHT]  23.81,106.89 270 top
R72  2.2k  [0402-TIGHT]  10.39,126.93 0 top
R73  2.2k  [0402-TIGHT]  10.49,129.29 0 top
R74  2.2k  [0402-TIGHT]  14.36,121.89 180 top
R75  10k  [0402-TIGHT]  14.06,106.39 180 top
R76  10k  [0402-TIGHT]  20.31,120.69 180 top
R77  10k  [0402-TIGHT]  15.96,118.35 270 top
R78  1k  [0402-TIGHT]  22.06,121.89 180 top
R79  5.1k  [0402-TIGHT]  47.63,83.79 270 top
R80  5.1k  [0402-TIGHT]  39.91,86.01 0 top
R81  4.7k  [0402-TIGHT]  41.43,100.49 0 top
R82  2.0K  [0402-TIGHT]  47.93,98.09 270 top
R83  10k  [0402-TIGHT]  46.03,98.59 180 top
R84  10k  [0402-TIGHT]  47.18,106.89 270 top
R85  2.2k  [0402-TIGHT]  33.76,126.93 0 top
R86  2.2k  [0402-TIGHT]  33.86,129.29 0 top
R87  2.2k  [0402-TIGHT]  37.73,121.89 180 top
R88  10k  [0402-TIGHT]  37.43,106.39 180 top
R89  10k  [0402-TIGHT]  43.68,120.69 180 top
R90  10k  [0402-TIGHT]  39.33,118.35 270 top
R91  1k  [0402-TIGHT]  45.43,121.89 180 top
R92  5.1k  [0402-TIGHT]  70.99,83.79 270 top
R93  5.1k  [0402-TIGHT]  63.27,86.01 0 top
R94  4.7k  [0402-TIGHT]  64.79,100.49 0 top
R95  2.0K  [0402-TIGHT]  71.29,98.09 270 top
R96  10k  [0402-TIGHT]  69.39,98.59 180 top
R97  10k  [0402-TIGHT]  70.54,106.89 270 top
R98  2.2k  [0402-TIGHT]  57.12,126.93 0 top
R99  2.2k  [0402-TIGHT]  57.22,129.29 0 top
R100  2.2k  [0402-TIGHT]  61.09,121.89 180 top
R101  10k  [0402-TIGHT]  60.79,106.39 180 top
R102  10k  [0402-TIGHT]  67.04,120.69 180 top
R103  10k  [0402-TIGHT]  62.69,118.35 270 top
R104  1k  [0402-TIGHT]  68.79,121.89 180 top
R105  5.1k  [0402-TIGHT]  94.36,83.79 270 top
R106  5.1k  [0402-TIGHT]  86.64,86.01 0 top
R107  4.7k  [0402-TIGHT]  88.16,100.49 0 top
R108  2.0K  [0402-TIGHT]  94.66,98.09 270 top
R109  10k  [0402-TIGHT]  92.76,98.59 180 top
R110  10k  [0402-TIGHT]  93.91,106.89 270 top
R111  2.2k  [0402-TIGHT]  80.49,126.93 0 top
R112  2.2k  [0402-TIGHT]  80.59,129.29 0 top
R113  2.2k  [0402-TIGHT]  84.46,121.89 180 top
R114  10k  [0402-TIGHT]  84.16,106.39 180 top
R115  10k  [0402-TIGHT]  90.41,120.69 180 top
R116  10k  [0402-TIGHT]  86.06,118.35 270 top
R117  1k  [0402-TIGHT]  92.16,121.89 180 top
R118  5.1k  [0402-TIGHT]  117.73,83.79 270 top
R119  5.1k  [0402-TIGHT]  110.01,86.01 0 top
R120  4.7k  [0402-TIGHT]  111.53,100.49 0 top
R121  2.0K  [0402-TIGHT]  118.03,98.09 270 top
R122  10k  [0402-TIGHT]  116.13,98.59 180 top
R123  10k  [0402-TIGHT]  117.28,106.89 270 top
R124  2.2k  [0402-TIGHT]  103.86,126.93 0 top
R125  2.2k  [0402-TIGHT]  103.96,129.29 0 top
R126  2.2k  [0402-TIGHT]  107.83,121.89 180 top
R127  10k  [0402-TIGHT]  107.53,106.39 180 top
R128  10k  [0402-TIGHT]  113.78,120.69 180 top
R129  10k  [0402-TIGHT]  109.43,118.35 270 top
R130  1k  [0402-TIGHT]  115.53,121.89 180 top
S1  Reset  [TACTILE_SWITCH_SMD_4.6X2.8MM]  27.91,18.01 270 top
S2  Reset  [TACTILE_SWITCH_SMD_4.6X2.8MM]  51.28,18.01 270 top
S3  Reset  [TACTILE_SWITCH_SMD_4.6X2.8MM]  74.65,18.01 270 top
S4  Reset  [TACTILE_SWITCH_SMD_4.6X2.8MM]  98.02,18.01 270 top
S5  Reset  [TACTILE_SWITCH_SMD_4.6X2.8MM]  121.38,18.01 270 top
S6  Reset  [TACTILE_SWITCH_SMD_4.6X2.8MM]  27.91,87.1 270 top
S7  Reset  [TACTILE_SWITCH_SMD_4.6X2.8MM]  51.28,87.1 270 top
S8  Reset  [TACTILE_SWITCH_SMD_4.6X2.8MM]  74.65,87.1 270 top
S9  Reset  [TACTILE_SWITCH_SMD_4.6X2.8MM]  98.02,87.1 270 top
S10  Reset  [TACTILE_SWITCH_SMD_4.6X2.8MM]  121.38,87.1 270 top
SHLD  [SMT-JUMPER_2_NC_TRACE_SILK]  23.16,12.4 0 bottom
SHLD1  [SMT-JUMPER_2_NC_TRACE_SILK]  46.53,12.4 0 bottom
SHLD2  [SMT-JUMPER_2_NC_TRACE_SILK]  69.89,12.4 0 bottom
SHLD3  [SMT-JUMPER_2_NC_TRACE_SILK]  93.26,12.4 0 bottom
SHLD4  [SMT-JUMPER_2_NC_TRACE_SILK]  116.63,12.4 0 bottom
SHLD5  [SMT-JUMPER_2_NC_TRACE_SILK]  23.16,81.49 0 bottom
SHLD6  [SMT-JUMPER_2_NC_TRACE_SILK]  46.53,81.49 0 bottom
SHLD7  [SMT-JUMPER_2_NC_TRACE_SILK]  69.89,81.49 0 bottom
SHLD8  [SMT-JUMPER_2_NC_TRACE_SILK]  93.26,81.49 0 bottom
SHLD9  [SMT-JUMPER_2_NC_TRACE_SILK]  116.63,81.49 0 bottom
TP1  TEST-POINT3X5  [PAD.03X.05]  22.1,32.26 0 bottom
TP2  TEST-POINT3X5  [PAD.03X.05]  18.29,53.85 0 bottom
TP3  TEST-POINT3X5  [PAD.03X.05]  11.94,15.75 0 bottom
TP4  TEST-POINT3X5  [PAD.03X.05]  11.94,20.83 0 bottom
TP5  TEST-POINT3X5  [PAD.03X.05]  35.31,15.75 0 bottom
TP6  TEST-POINT3X5  [PAD.03X.05]  41.66,53.85 0 bottom
TP7  TEST-POINT3X5  [PAD.03X.05]  14.48,41.15 0 bottom
TP8  TEST-POINT3X5  [PAD.03X.05]  13.21,46.23 0 bottom
TP9  TEST-POINT3X5  [PAD.03X.05]  20.83,50.04 0 bottom
TP10  TEST-POINT3X5  [PAD.03X.05]  35.31,20.83 0 bottom
TP11  TEST-POINT3X5  [PAD.03X.05]  36.58,46.23 0 bottom
TP12  TEST-POINT3X5  [PAD.03X.05]  44.2,50.04 0 bottom
TP13  TEST-POINT3X5  [PAD.03X.05]  37.85,41.15 0 bottom
TP14  TEST-POINT3X5  [PAD.03X.05]  45.47,32.26 0 bottom
TP15  TEST-POINT3X5  [PAD.03X.05]  58.67,15.75 0 bottom
TP16  TEST-POINT3X5  [PAD.03X.05]  65.02,53.85 0 bottom
TP17  TEST-POINT3X5  [PAD.03X.05]  58.67,20.83 0 bottom
TP18  TEST-POINT3X5  [PAD.03X.05]  59.94,46.23 0 bottom
TP19  TEST-POINT3X5  [PAD.03X.05]  67.56,50.04 0 bottom
TP20  TEST-POINT3X5  [PAD.03X.05]  61.21,41.15 0 bottom
TP21  TEST-POINT3X5  [PAD.03X.05]  68.83,32.26 0 bottom
TP22  TEST-POINT3X5  [PAD.03X.05]  82.04,15.75 0 bottom
TP23  TEST-POINT3X5  [PAD.03X.05]  88.39,53.85 0 bottom
TP24  TEST-POINT3X5  [PAD.03X.05]  82.04,20.83 0 bottom
TP25  TEST-POINT3X5  [PAD.03X.05]  83.31,46.23 0 bottom
TP26  TEST-POINT3X5  [PAD.03X.05]  90.93,50.04 0 bottom
TP27  TEST-POINT3X5  [PAD.03X.05]  84.58,41.15 0 bottom
TP28  TEST-POINT3X5  [PAD.03X.05]  92.2,32.26 0 bottom
TP29  TEST-POINT3X5  [PAD.03X.05]  105.41,15.75 0 bottom
TP30  TEST-POINT3X5  [PAD.03X.05]  111.76,53.85 0 bottom
TP31  TEST-POINT3X5  [PAD.03X.05]  105.41,20.83 0 bottom
TP32  TEST-POINT3X5  [PAD.03X.05]  106.68,46.23 0 bottom
TP33  TEST-POINT3X5  [PAD.03X.05]  114.3,50.04 0 bottom
TP34  TEST-POINT3X5  [PAD.03X.05]  107.95,41.15 0 bottom
TP35  TEST-POINT3X5  [PAD.03X.05]  115.57,32.26 0 bottom
TP36  TEST-POINT3X5  [PAD.03X.05]  11.94,84.84 0 bottom
TP37  TEST-POINT3X5  [PAD.03X.05]  18.29,122.94 0 bottom
TP38  TEST-POINT3X5  [PAD.03X.05]  11.94,89.92 0 bottom
TP39  TEST-POINT3X5  [PAD.03X.05]  13.21,115.32 0 bottom
TP40  TEST-POINT3X5  [PAD.03X.05]  20.83,119.13 0 bottom
TP41  TEST-POINT3X5  [PAD.03X.05]  14.48,110.24 0 bottom
TP42  TEST-POINT3X5  [PAD.03X.05]  22.1,101.35 0 bottom
TP43  TEST-POINT3X5  [PAD.03X.05]  35.31,84.84 0 bottom
TP44  TEST-POINT3X5  [PAD.03X.05]  41.66,122.94 0 bottom
TP45  TEST-POINT3X5  [PAD.03X.05]  35.31,89.92 0 bottom
TP46  TEST-POINT3X5  [PAD.03X.05]  36.58,115.32 0 bottom
TP47  TEST-POINT3X5  [PAD.03X.05]  44.2,119.13 0 bottom
TP48  TEST-POINT3X5  [PAD.03X.05]  37.85,110.24 0 bottom
TP49  TEST-POINT3X5  [PAD.03X.05]  45.47,101.35 0 bottom
TP50  TEST-POINT3X5  [PAD.03X.05]  58.67,84.84 0 bottom
TP51  TEST-POINT3X5  [PAD.03X.05]  65.02,122.94 0 bottom
TP52  TEST-POINT3X5  [PAD.03X.05]  58.67,89.92 0 bottom
TP53  TEST-POINT3X5  [PAD.03X.05]  59.94,115.32 0 bottom
TP54  TEST-POINT3X5  [PAD.03X.05]  67.56,119.13 0 bottom
TP55  TEST-POINT3X5  [PAD.03X.05]  61.21,110.24 0 bottom
TP56  TEST-POINT3X5  [PAD.03X.05]  68.83,101.35 0 bottom
TP57  TEST-POINT3X5  [PAD.03X.05]  82.04,84.84 0 bottom
TP58  TEST-POINT3X5  [PAD.03X.05]  88.39,122.94 0 bottom
TP59  TEST-POINT3X5  [PAD.03X.05]  82.04,89.92 0 bottom
TP60  TEST-POINT3X5  [PAD.03X.05]  83.31,115.32 0 bottom
TP61  TEST-POINT3X5  [PAD.03X.05]  90.93,119.13 0 bottom
TP62  TEST-POINT3X5  [PAD.03X.05]  84.58,110.24 0 bottom
TP63  TEST-POINT3X5  [PAD.03X.05]  92.2,101.35 0 bottom
TP64  TEST-POINT3X5  [PAD.03X.05]  105.41,84.84 0 bottom
TP65  TEST-POINT3X5  [PAD.03X.05]  111.76,122.94 0 bottom
TP66  TEST-POINT3X5  [PAD.03X.05]  105.41,89.92 0 bottom
TP67  TEST-POINT3X5  [PAD.03X.05]  106.68,115.32 0 bottom
TP68  TEST-POINT3X5  [PAD.03X.05]  114.3,119.13 0 bottom
TP69  TEST-POINT3X5  [PAD.03X.05]  107.95,110.24 0 bottom
TP70  TEST-POINT3X5  [PAD.03X.05]  115.57,101.35 0 bottom
U1  ESD Diode  [SOT-23-6]  22.96,19.4 90 top
U2  U-BLOX_NINA_B306  [NINA_B306]  18.09,67.64 0 top
U3  XC6222B331MR-G  [SOT23-5]  22.59,45.16 0 top
U4  MCP73831  [SOT23-5]  20.99,27.55 270 top
U5  MAX17048  [DFN-8]  13.51,34.61 0 top
U6  ISM330DHCX  [LGA-14L]  18.29,48.77 0 top
U7  BME280  [LGA-8-2.5X2.5]  13.56,40.3 90 top
U8  ESD Diode  [SOT-23-6]  46.33,19.4 90 top
U9  U-BLOX_NINA_B306  [NINA_B306]  41.46,67.64 0 top
U10  MCP73831  [SOT23-5]  44.36,27.55 270 top
U11  XC6222B331MR-G  [SOT23-5]  45.96,45.16 0 top
U12  MAX17048  [DFN-8]  36.88,34.61 0 top
U13  BME280  [LGA-8-2.5X2.5]  36.93,40.3 90 top
U14  ISM330DHCX  [LGA-14L]  41.66,48.77 0 top
U15  ESD Diode  [SOT-23-6]  69.69,19.4 90 top
U16  U-BLOX_NINA_B306  [NINA_B306]  64.82,67.64 0 top
U17  MCP73831  [SOT23-5]  67.72,27.55 270 top
U18  XC6222B331MR-G  [SOT23-5]  69.32,45.16 0 top
U19  MAX17048  [DFN-8]  60.24,34.61 0 top
U20  BME280  [LGA-8-2.5X2.5]  60.29,40.3 90 top
U21  ISM330DHCX  [LGA-14L]  65.02,48.77 0 top
U22  ESD Diode  [SOT-23-6]  93.06,19.4 90 top
U23  U-BLOX_NINA_B306  [NINA_B306]  88.19,67.64 0 top
U24  MCP73831  [SOT23-5]  91.09,27.55 270 top
U25  XC6222B331MR-G  [SOT23-5]  92.69,45.16 0 top
U26  MAX17048  [DFN-8]  83.61,34.61 0 top
U27  BME280  [LGA-8-2.5X2.5]  83.66,40.3 90 top
U28  ISM330DHCX  [LGA-14L]  88.39,48.77 0 top
U29  ESD Diode  [SOT-23-6]  116.43,19.4 90 top
U30  U-BLOX_NINA_B306  [NINA_B306]  111.56,67.64 0 top
U31  MCP73831  [SOT23-5]  114.46,27.55 270 top
U32  XC6222B331MR-G  [SOT23-5]  116.06,45.16 0 top
U33  MAX17048  [DFN-8]  106.98,34.61 0 top
U34  BME280  [LGA-8-2.5X2.5]  107.03,40.3 90 top
U35  ISM330DHCX  [LGA-14L]  111.76,48.77 0 top
U36  ESD Diode  [SOT-23-6]  22.96,88.49 90 top
U37  U-BLOX_NINA_B306  [NINA_B306]  18.09,136.73 0 top
U38  MCP73831  [SOT23-5]  20.99,96.64 270 top
U39  XC6222B331MR-G  [SOT23-5]  22.59,114.25 0 top
U40  MAX17048  [DFN-8]  13.51,103.7 0 top
U41  BME280  [LGA-8-2.5X2.5]  13.56,109.39 90 top
U42  ISM330DHCX  [LGA-14L]  18.29,117.86 0 top
U43  ESD Diode  [SOT-23-6]  46.33,88.49 90 top
U44  U-BLOX_NINA_B306  [NINA_B306]  41.46,136.73 0 top
U45  MCP73831  [SOT23-5]  44.36,96.64 270 top
U46  XC6222B331MR-G  [SOT23-5]  45.96,114.25 0 top
U47  MAX17048  [DFN-8]  36.88,103.7 0 top
U48  BME280  [LGA-8-2.5X2.5]  36.93,109.39 90 top
U49  ISM330DHCX  [LGA-14L]  41.66,117.86 0 top
U50  ESD Diode  [SOT-23-6]  69.69,88.49 90 top
U51  U-BLOX_NINA_B306  [NINA_B306]  64.82,136.73 0 top
U52  MCP73831  [SOT23-5]  67.72,96.64 270 top
U53  XC6222B331MR-G  [SOT23-5]  69.32,114.25 0 top
U54  MAX17048  [DFN-8]  60.24,103.7 0 top
U55  BME280  [LGA-8-2.5X2.5]  60.29,109.39 90 top
U56  ISM330DHCX  [LGA-14L]  65.02,117.86 0 top
U57  ESD Diode  [SOT-23-6]  93.06,88.49 90 top
U58  U-BLOX_NINA_B306  [NINA_B306]  88.19,136.73 0 top
U59  MCP73831  [SOT23-5]  91.09,96.64 270 top
U60  XC6222B331MR-G  [SOT23-5]  92.69,114.25 0 top
U61  MAX17048  [DFN-8]  83.61,103.7 0 top
U62  BME280  [LGA-8-2.5X2.5]  83.66,109.39 90 top
U63  ISM330DHCX  [LGA-14L]  88.39,117.86 0 top
U64  ESD Diode  [SOT-23-6]  116.43,88.49 90 top
U65  U-BLOX_NINA_B306  [NINA_B306]  111.56,136.73 0 top
U66  MCP73831  [SOT23-5]  114.46,96.64 270 top
U67  XC6222B331MR-G  [SOT23-5]  116.06,114.25 0 top
U68  MAX17048  [DFN-8]  106.98,103.7 0 top
U69  BME280  [LGA-8-2.5X2.5]  107.03,109.39 90 top
U70  ISM330DHCX  [LGA-14L]  111.76,117.86 0 top
U$1  [SFE_LOGO_FLAME_STOP_.1]  9.34,18.26 0 bottom
U$2  [SFE_LOGO_FLAME_.2]  18.29,42.42 0 top
U$3  [#_VU#0]  8.13,38.61 0 top
U$4  [#_EN#47]  8.16,36.1 0 top
U$5  [#3V3_#0]  28.45,25.91 0 top
U$6  [#_44#49]  8.26,41.1 0 top
U$7  [#_1#49]  8.36,43.7 0 top
U$8  [#_2#49]  8.26,46.2 0 top
U$9  [#_3#49]  8.26,48.76 0 top
U$10  [#_4#49]  8.26,51.3 0 top
U$11  [#_25#49]  8.2,53.85 0 top
U$12  [#_35#0]  8.16,56.4 0 top
U$13  [#_SCL#49]  8.16,58.9 0 top
U$14  [RESET0]  25.65,18.16 90 top
U$15  [SFE_LOGO_FLAME_STOP_.1]  32.71,18.26 0 bottom
U$16  [#GND_#53]  28.46,31 0 top
U$17  [#A0_#54]  28.36,33.5 0 top
U$18  [#A1_#54]  28.12,36.05 0 top
U$19  [#A2_#54]  28.36,38.6 0 top
U$20  [#A3_#54]  28.35,41.19 0 top
U$21  [#A4_#54]  28.36,43.7 0 top
U$22  [#A5_#54]  28.26,46.26 0 top
U$23  [#SCK_#54]  28.46,48.8 0 top
U$24  [#PICO_#60]  28.46,51.3 0 top
U$25  [#POCI_#61]  28.46,53.86 0 top
U$26  [#TXO_#57]  28.46,58.94 0 top
U$27  [#RXI_#59]  28.29,56.36 0 top
U$28  [#38_#60]  28.38,61.44 0 top
U$29  [#_SDA#68]  8.16,61.5 0 top
U$30  [#_CHG#30707]  18.66,33 90 bottom
U$31  [#_3V3#0]  28.32,25.91 0 bottom
U$32  [#_GND#70]  28.36,31 0 bottom
U$33  [#_A0#71]  28.26,33.5 0 bottom
U$34  [#_A1#71]  28.26,36.05 0 bottom
U$35  [#_A2#71]  28.26,38.6 0 bottom
U$36  [#_A3#71]  28.26,41.2 0 bottom
U$37  [#_A4#71]  28.26,43.7 0 bottom
U$38  [#_A5#71]  28.26,46.26 0 bottom
U$39  [#_SCK#71]  28.26,48.8 0 bottom
U$40  [#_PICO#72]  28.26,51.3 0 bottom
U$41  [#_POCI#73]  28.26,53.86 0 bottom
U$42  [#_TXO#74]  28.26,58.94 0 bottom
U$43  [#_RXI#75]  28.39,56.36 0 bottom
U$44  [#_38#76]  28.26,61.44 0 bottom
U$45  [#35_#0]  11.66,56.4 0 bottom
U$46  [#25_#79]  8.16,53.8 0 bottom
U$47  [#4_#79]  8.26,51.3 0 bottom
U$48  [#3_#79]  8.26,48.8 0 bottom
U$49  [#2_#79]  8.26,46.2 0 bottom
U$50  [#1_#79]  8.36,43.7 0 bottom
U$51  [#44_#79]  8.26,41.1 0 bottom
U$52  [#VBAT_#0]  8.13,33.53 0 bottom
U$53  [#EN_#80]  8.16,36.1 0 bottom
U$54  [##RST#_#0]  28.32,23.37 0 top
U$55  [#SDA_#82]  15.56,61.1 0 bottom
U$56  [#SCL_#85]  11.46,59.1 0 bottom
U$57  [#_PWR#90]  17.46,51.9 0 bottom
U$58  [#VUSB_#0]  8.13,38.61 0 bottom
U$59  [#_SHLD#93]  22.26,12.4 0 bottom
U$60  [SPARKFUN_THING_PLUS96]  18.16,73.8 0 bottom
U$61  [NINA#B30697]  18.16,72.2 0 bottom
U$62  [#MEAS#30701]  19.46,38.2 90 top
U$63  [#_VB#0]  8.25,33.53 0 top
U$64  [RGB30710]  18.36,57.2 0 top
U$65  [STAT30711]  13.46,55.4 90 top
U$66  [PWR30712]  21.46,55.15 90 top
U$67  [NINA#B30630713]  18.29,58.8 0 top
U$68  [X2114]  15.59,46.87 180 top
U$69  [Y2115]  12.6,47.74 0 top
U$70  [Z2116]  12.03,45.6 180 top
U$71  [IO414130630715]  15.66,55.2 90 top
U$72  [IO34414130630716]  18.26,53.9 0 top
U$73  [CHG0]  16.16,28.5 0 top
U$74  [##RST#_#0]  28.46,23.2 90 bottom
U$75  [#3]  15.49,25.02 0 top
U$76  [#4]  15.49,29.46 0 top
U$77  [SFE_LOGO_FLAME_.2]  41.66,42.42 0 top
U$78  [#_EN#47]  31.53,36.1 0 top
U$79  [#_44#49]  31.63,41.1 0 top
U$80  [#_1#49]  31.73,43.7 0 top
U$81  [#_2#49]  31.63,46.2 0 top
U$82  [#_3#49]  31.63,48.76 0 top
U$83  [#_4#49]  31.63,51.3 0 top
U$84  [#_25#49]  31.57,53.85 0 top